# EAGLE board microSD_Shield-GiantPanel-v14 (EAGLE 6.5.0), part 1 of 3
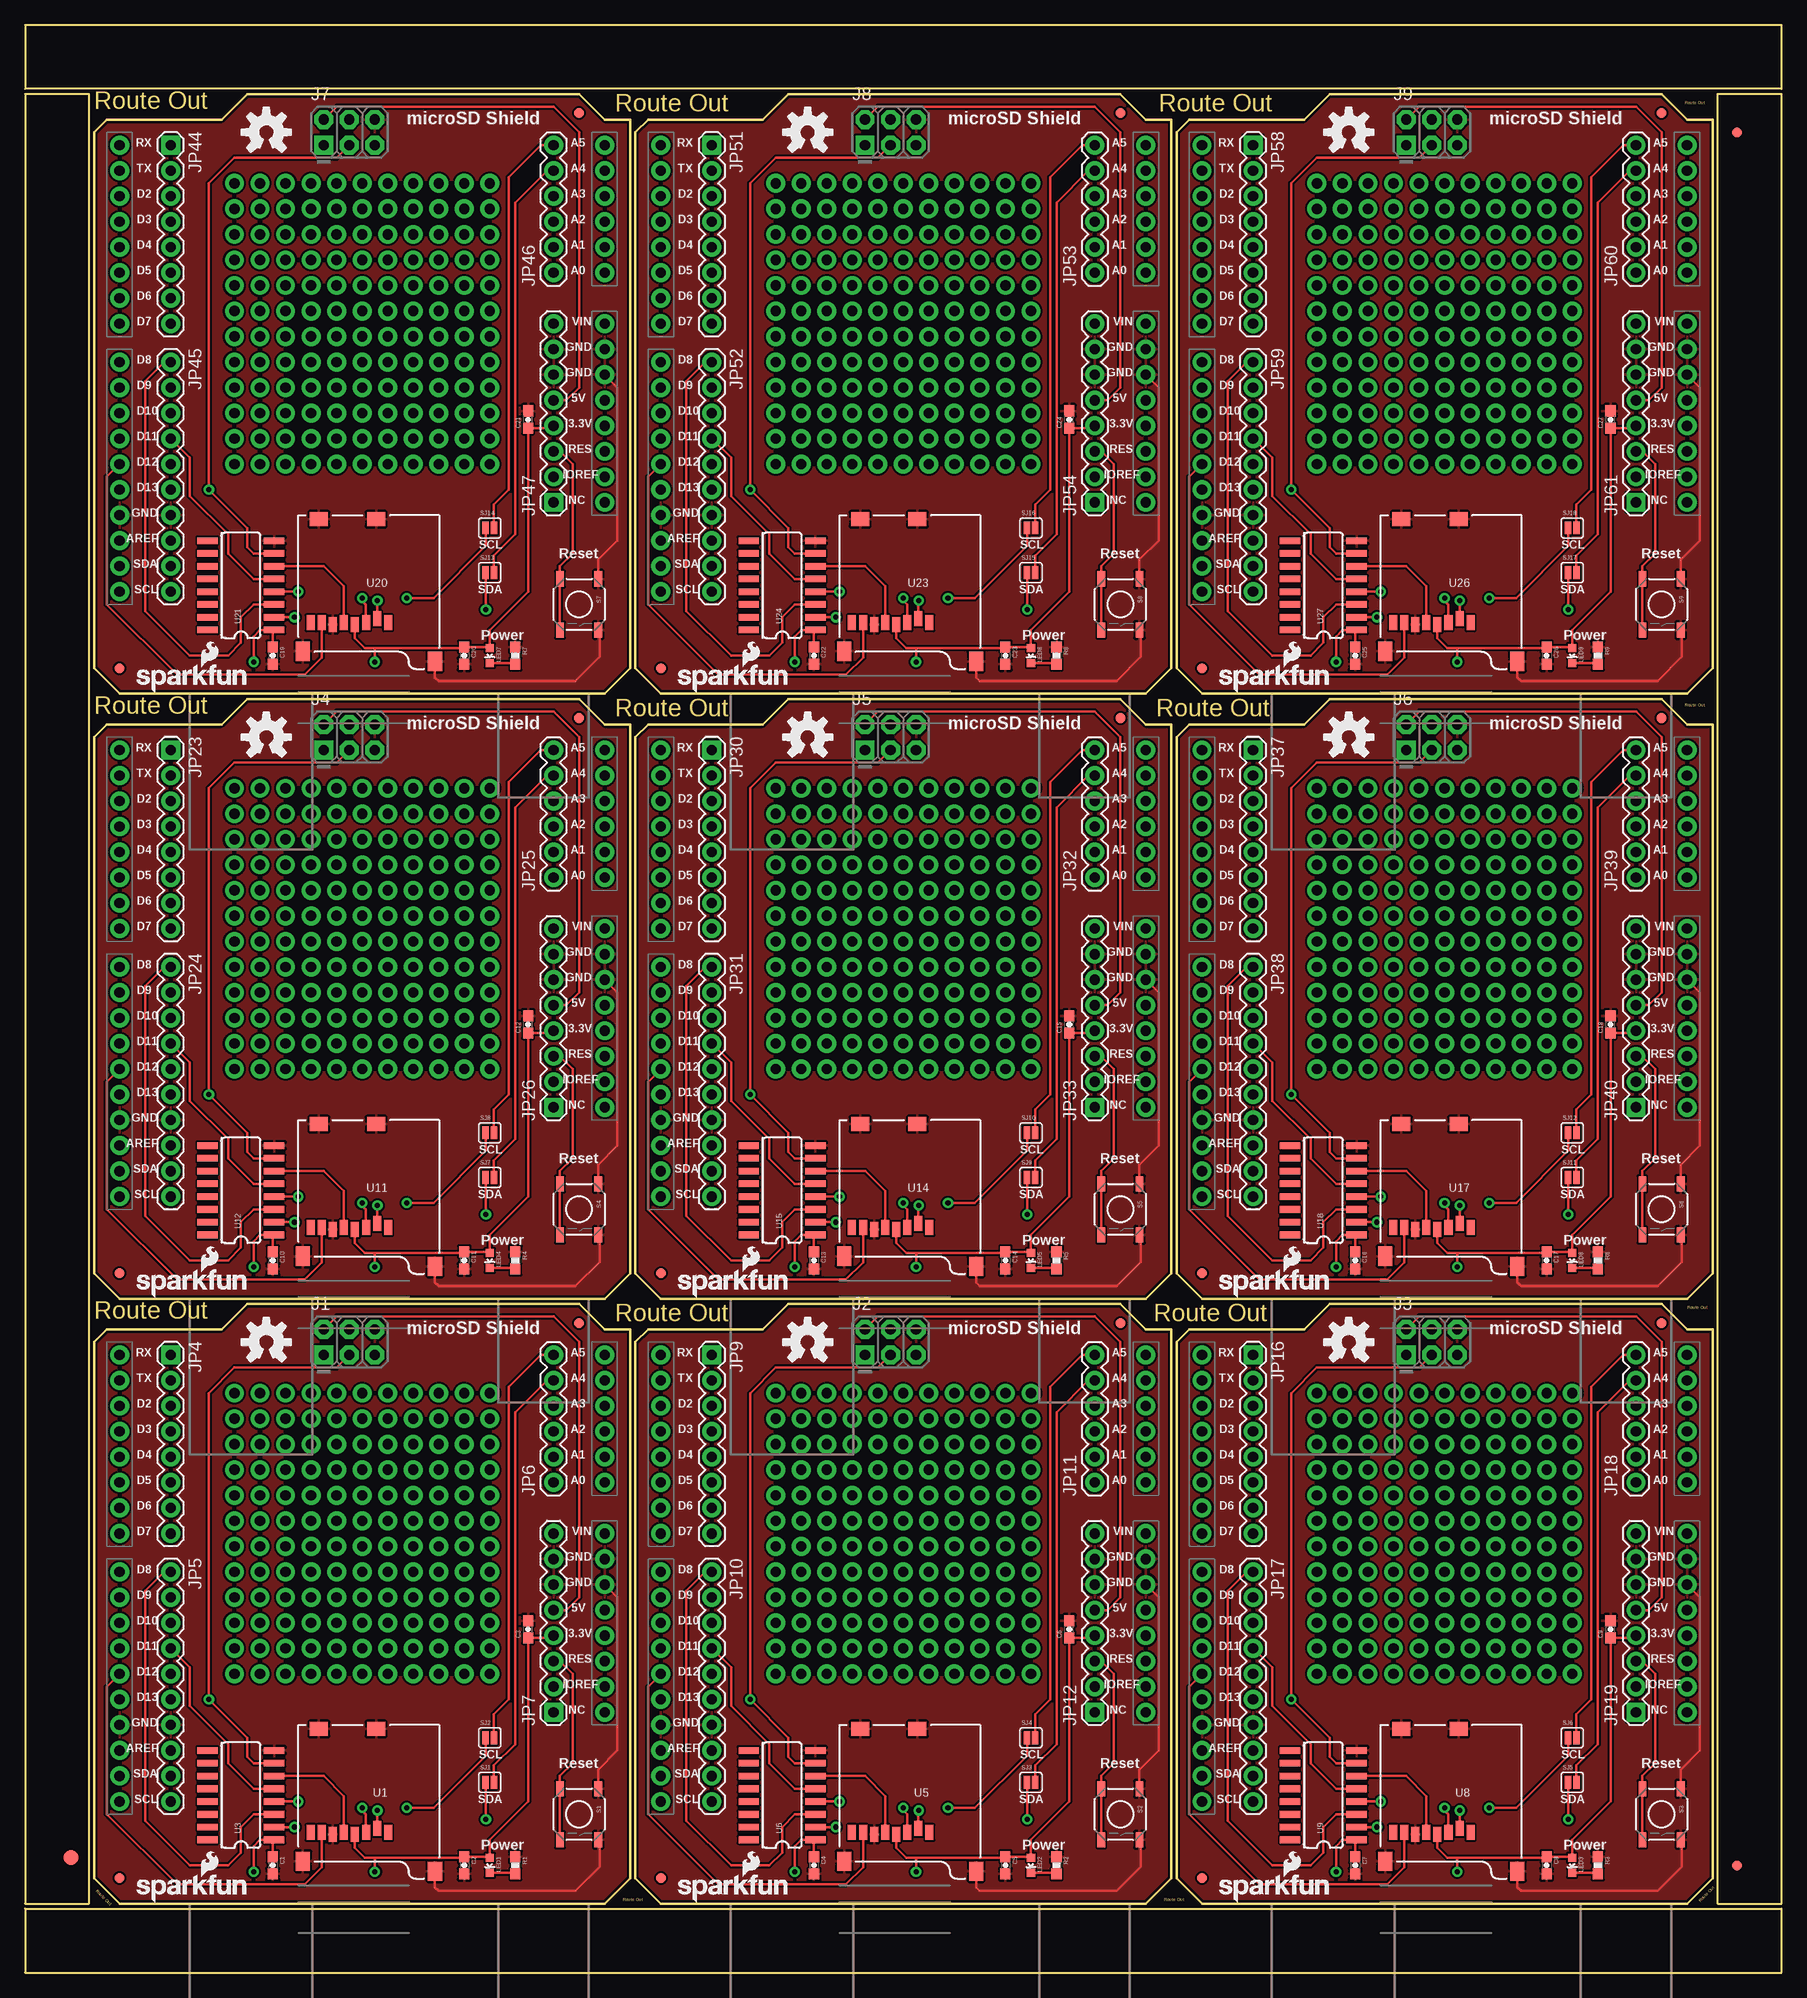
[diagram p0: board, top side]
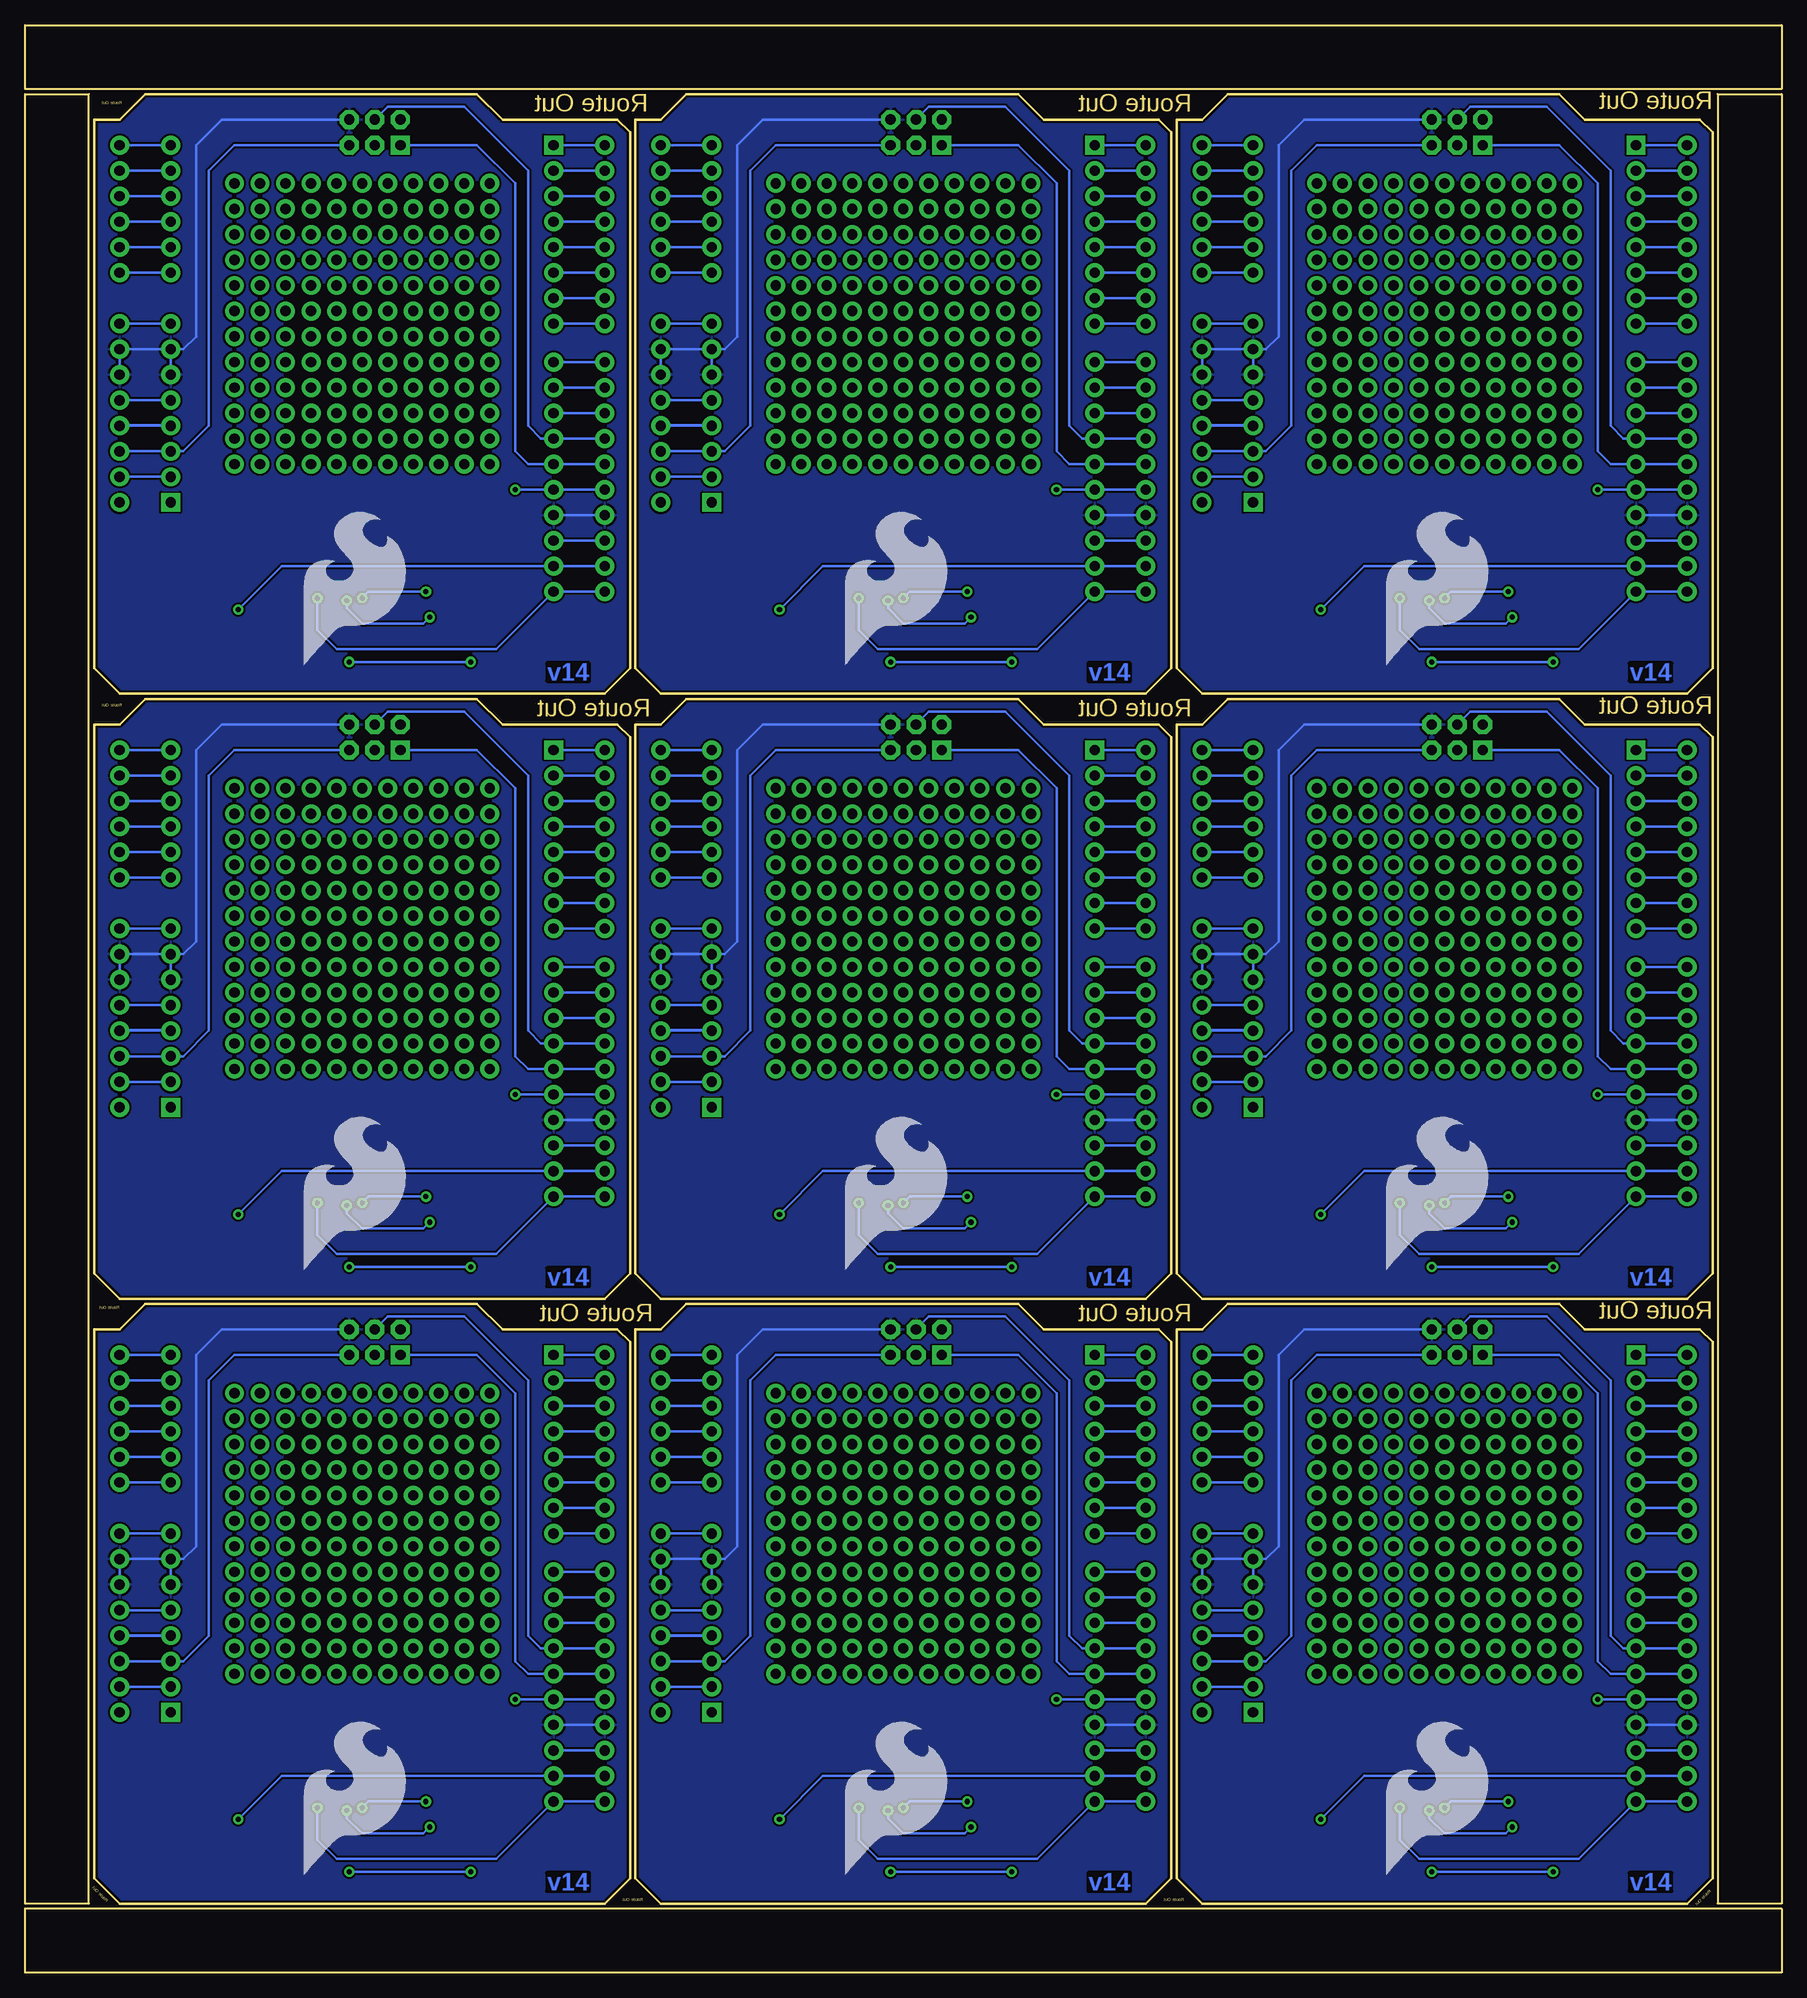
[diagram p1: board, bottom side, seen from below]

Size 174.75 x 193.8 mm. Coordinates in mm from the lower left corner, seen from the top.
Outline: 6.86,9.4 6.86,62.74 8.13,64.01 19.56,64.01 22.1,66.55 55.12,66.55 57.66,64.01 60.2,64.01 60.2,9.4 57.66,6.86 9.4,6.86 6.86,9.4
Outline: 60.71,9.4 60.71,62.74 61.98,64.01 73.41,64.01 75.95,66.55 108.97,66.55 111.51,64.01 114.05,64.01 114.05,9.4 111.51,6.86 63.25,6.86 60.71,9.4
Outline: 114.55,9.4 114.55,62.74 115.82,64.01 127.25,64.01 129.79,66.55 162.81,66.55 165.35,64.01 167.89,64.01 167.89,9.4 165.35,6.86 117.09,6.86 114.55,9.4
Outline: 6.86,69.6 6.86,122.94 8.13,124.21 19.56,124.21 22.1,126.75 55.12,126.75 57.66,124.21 60.2,124.21 60.2,69.6 57.66,67.06 9.4,67.06 6.86,69.6
Outline: 60.71,69.6 60.71,122.94 61.98,124.21 73.41,124.21 75.95,126.75 108.97,126.75 111.51,124.21 114.05,124.21 114.05,69.6 111.51,67.06 63.25,67.06 60.71,69.6
Outline: 114.55,69.6 114.55,122.94 115.82,124.21 127.25,124.21 129.79,126.75 162.81,126.75 165.35,124.21 167.89,124.21 167.89,69.6 165.35,67.06 117.09,67.06 114.55,69.6
Outline: 6.86,129.79 6.86,183.13 8.13,184.4 19.56,184.4 22.1,186.94 55.12,186.94 57.66,184.4 60.2,184.4 60.2,129.79 57.66,127.25 9.4,127.25 6.86,129.79
Outline: 60.71,129.79 60.71,183.13 61.98,184.4 73.41,184.4 75.95,186.94 108.97,186.94 111.51,184.4 114.05,184.4 114.05,129.79 111.51,127.25 63.25,127.25 60.71,129.79
Outline: 114.55,129.79 114.55,183.13 115.82,184.4 127.25,184.4 129.79,186.94 162.81,186.94 165.35,184.4 167.89,184.4 167.89,129.79 165.35,127.25 117.09,127.25 114.55,129.79
Outline: 0,6.86 6.35,6.86 6.35,186.94 0,186.94 0,6.86
Outline: 0,0 174.75,0 174.75,6.35 0,6.35 0,0
Outline: 0,193.8 0,187.45 174.75,187.45 174.75,193.8 0,193.8
Outline: 174.75,186.94 168.4,186.94 168.4,6.86 174.75,6.86 174.75,186.94
Copper layers (1*16): Top 0.035mm / dielectric 1.5mm / Bottom 0.035mm
Design rules "SparkFun *": minimum track width 8mil, minimum drill 20mil, track to track 8mil, track to pad 8mil, pad to pad 8mil, via to via 8mil, smd to smd 8mil, copper to edge 9mil, drill to drill 8mil, minimum pad ring 12mil, minimum via ring 10mil, stop-mask expansion 4mil, vias tented up to drill 20mil, thermal gap 10mil

## Footprints (pad centres in the part's own frame; a part is rotated, then mirrored left to right if it is on the bottom)
0603-CAP = smd 1.1 x 1: 1 -0.85,0; 2 0.85,0
FIDUCIAL-1.5X3 = smd 1.5 x 1.5: 1 0,0
FIDUCIAL-1X2 = smd 1 x 1: 1 0,0
2X3-NS = drill 1.016 pad 1.88 square: 1 -2.54,-1.27 | drill 1.016 pad 1.88 octagon: 2 -2.54,1.27; 3 0,-1.27; 4 0,1.27; 5 2.54,-1.27; 6 2.54,1.27
1X08 = drill 1.016 pad 1.88 square: 1 0,0 | drill 1.016 pad 1.88: 2 2.54,0; 3 5.08,0; 4 7.62,0; 5 10.16,0; 6 12.7,0; 7 15.24,0; 8 17.78,0
1X10 = drill 1.016 pad 1.88: 1 0,0; 2 2.54,0; 3 5.08,0; 4 7.62,0; 5 10.16,0; 6 12.7,0; 7 15.24,0; 8 17.78,0; 9 20.32,0; 10 22.86,0
1X06 = drill 1.016 pad 1.88: 1 0,0; 2 2.54,0; 3 5.08,0; 4 7.62,0; 5 10.16,0; 6 12.7,0
LED-0603 = smd 0.8 x 0.8: A 0,-0.75; C 0,0.75
0603-RES = smd 1.1 x 1: 1 -0.85,0; 2 0.85,0
TACTILE_SWITCH_SMD = smd 1.524 x 0.762: 1 -2.54,1.905; 2 2.54,1.905; 3 -2.54,-1.905; 4 2.54,-1.905
SJ_2S = smd 0.635 x 1.27: 1 -0.412,0; 2 0.412,0
MICRO-SD-SOCKET-PP = smd 0.8 x 1.5: 1 -8.94,10.7; 2 -7.84,10.3; 3 -6.74,10.7; 4 -5.64,10.9; 5 -4.54,10.7; 6 -3.44,10.9; 7 -2.34,10.7; 8 -1.24,10.7 | smd 1.8 x 1.4: CD1 -2.05,0.4; CD2 -7.75,0.4 | smd 1.4 x 1.9: GND1 -13.6,14.55; GND3 -0.45,13.55
UNO_R3_SHIELD_NOLABELS = drill 1.016 pad 1.88: 3.3V 50.8,26.67; 5V 50.8,29.21; A0 50.8,41.91; A1 50.8,44.45; A2 50.8,46.99; A3 50.8,49.53; A4 50.8,52.07; A5 50.8,54.61; AREF 2.54,15.24; D2 2.54,49.53; D3 2.54,46.99; D4 2.54,44.45; D5 2.54,41.91; D6 2.54,39.37; D7 2.54,36.83; D8 2.54,33.02; D9 2.54,30.48; D10 2.54,27.94; D11 2.54,25.4; D12 2.54,22.86; D13 2.54,20.32; GND@0 50.8,31.75; GND@1 50.8,34.29; GND@2 2.54,17.78; IOREF 50.8,21.59; NC 50.8,19.05; RES 50.8,24.13; RX 2.54,54.61; SCL 2.54,10.16; SDA 2.54,12.7; TX 2.54,52.07; VIN 50.8,36.83
SO016 = smd 0.66 x 2.032: 1 -4.445,-3.315; 2 -3.175,-3.315; 3 -1.905,-3.315; 4 -0.635,-3.315; 5 0.635,-3.315; 6 1.905,-3.315; 7 3.175,-3.315; 8 4.445,-3.315; 9 4.445,3.315; 10 3.175,3.315; 11 1.905,3.315; 12 0.635,3.315; 13 -0.635,3.315; 14 -1.905,3.315; 15 -3.175,3.315; 16 -4.445,3.315

## Placement (x,y rotation side)
C1  0.1uF  [0603-CAP]  24.64,10.67 270 top
C2  0.1uF  [0603-CAP]  43.69,10.67 270 top
C3  10uF  [0603-CAP]  50.04,34.16 90 top
C4  0.1uF  [0603-CAP]  78.49,10.67 270 top
C5  0.1uF  [0603-CAP]  97.54,10.67 270 top
C6  10uF  [0603-CAP]  103.89,34.16 90 top
C7  0.1uF  [0603-CAP]  132.33,10.67 270 top
C8  0.1uF  [0603-CAP]  151.38,10.67 270 top
C9  10uF  [0603-CAP]  157.73,34.16 90 top
C10  0.1uF  [0603-CAP]  24.64,70.87 270 top
C11  0.1uF  [0603-CAP]  43.69,70.87 270 top
C12  10uF  [0603-CAP]  50.04,94.36 90 top
C13  0.1uF  [0603-CAP]  78.49,70.87 270 top
C14  0.1uF  [0603-CAP]  97.54,70.87 270 top
C15  10uF  [0603-CAP]  103.89,94.36 90 top
C16  0.1uF  [0603-CAP]  132.33,70.87 270 top
C17  0.1uF  [0603-CAP]  151.38,70.87 270 top
C18  10uF  [0603-CAP]  157.73,94.36 90 top
C19  0.1uF  [0603-CAP]  24.64,131.06 270 top
C20  0.1uF  [0603-CAP]  43.69,131.06 270 top
C21  10uF  [0603-CAP]  50.04,154.56 90 top
C22  0.1uF  [0603-CAP]  78.49,131.06 270 top
C23  0.1uF  [0603-CAP]  97.54,131.06 270 top
C24  10uF  [0603-CAP]  103.89,154.56 90 top
C25  0.1uF  [0603-CAP]  132.33,131.06 270 top
C26  0.1uF  [0603-CAP]  151.38,131.06 270 top
C27  10uF  [0603-CAP]  157.73,154.56 90 top
E$1  [FIDUCIAL-1.5X3]  4.57,11.43 0 top
E$6  [FIDUCIAL-1X2]  170.31,183.13 180 top
E$8  [FIDUCIAL-1X2]  170.31,10.67 0 top
J1  AVR_SPI_PRG_6NS  [2X3-NS]  32.26,62.74 0 top
J2  AVR_SPI_PRG_6NS  [2X3-NS]  86.11,62.74 0 top
J3  AVR_SPI_PRG_6NS  [2X3-NS]  139.95,62.74 0 top
J4  AVR_SPI_PRG_6NS  [2X3-NS]  32.26,122.94 0 top
J5  AVR_SPI_PRG_6NS  [2X3-NS]  86.11,122.94 0 top
J6  AVR_SPI_PRG_6NS  [2X3-NS]  139.95,122.94 0 top
J7  AVR_SPI_PRG_6NS  [2X3-NS]  32.26,183.13 0 top
J8  AVR_SPI_PRG_6NS  [2X3-NS]  86.11,183.13 0 top
J9  AVR_SPI_PRG_6NS  [2X3-NS]  139.95,183.13 0 top
JP1  SFE_LOGO_NAME_FLAME.1_INCH  [SFE_LOGO_NAME_FLAME_.1]  10.67,6.86 0 top
JP2  FIDUCIAL1X2  [FIDUCIAL-1X2]  55.12,64.64 0 top
JP3  FIDUCIAL1X2  [FIDUCIAL-1X2]  9.4,9.4 0 top
JP4  [1X08]  14.48,61.47 270 top
JP5  M10"  [1X10]  14.48,39.88 270 top
JP6  [1X06]  52.58,48.77 90 top
JP7  [1X08]  52.58,25.91 90 top
JP8  SFE_LOGO_NAME_FLAME.1_INCH  [SFE_LOGO_NAME_FLAME_.1]  64.52,6.86 0 top
JP9  [1X08]  68.33,61.47 270 top
JP10  M10"  [1X10]  68.33,39.88 270 top
JP11  [1X06]  106.43,48.77 90 top
JP12  [1X08]  106.43,25.91 90 top
JP13  FIDUCIAL1X2  [FIDUCIAL-1X2]  108.97,64.64 0 top
JP14  FIDUCIAL1X2  [FIDUCIAL-1X2]  63.25,9.4 0 top
JP15  SFE_LOGO_NAME_FLAME.1_INCH  [SFE_LOGO_NAME_FLAME_.1]  118.36,6.86 0 top
JP16  [1X08]  122.17,61.47 270 top
JP17  M10"  [1X10]  122.17,39.88 270 top
JP18  [1X06]  160.27,48.77 90 top
JP19  [1X08]  160.27,25.91 90 top
JP20  FIDUCIAL1X2  [FIDUCIAL-1X2]  162.81,64.64 0 top
JP21  FIDUCIAL1X2  [FIDUCIAL-1X2]  117.09,9.4 0 top
JP22  SFE_LOGO_NAME_FLAME.1_INCH  [SFE_LOGO_NAME_FLAME_.1]  10.67,67.06 0 top
JP23  [1X08]  14.48,121.67 270 top
JP24  M10"  [1X10]  14.48,100.08 270 top
JP25  [1X06]  52.58,108.97 90 top
JP26  [1X08]  52.58,86.11 90 top
JP27  FIDUCIAL1X2  [FIDUCIAL-1X2]  55.12,124.84 0 top
JP28  FIDUCIAL1X2  [FIDUCIAL-1X2]  9.4,69.6 0 top
JP29  SFE_LOGO_NAME_FLAME.1_INCH  [SFE_LOGO_NAME_FLAME_.1]  64.52,67.06 0 top
JP30  [1X08]  68.33,121.67 270 top
JP31  M10"  [1X10]  68.33,100.08 270 top
JP32  [1X06]  106.43,108.97 90 top
JP33  [1X08]  106.43,86.11 90 top
JP34  FIDUCIAL1X2  [FIDUCIAL-1X2]  108.97,124.84 0 top
JP35  FIDUCIAL1X2  [FIDUCIAL-1X2]  63.25,69.6 0 top
JP36  SFE_LOGO_NAME_FLAME.1_INCH  [SFE_LOGO_NAME_FLAME_.1]  118.36,67.06 0 top
JP37  [1X08]  122.17,121.67 270 top
JP38  M10"  [1X10]  122.17,100.08 270 top
JP39  [1X06]  160.27,108.97 90 top
JP40  [1X08]  160.27,86.11 90 top
JP41  FIDUCIAL1X2  [FIDUCIAL-1X2]  162.81,124.84 0 top
JP42  FIDUCIAL1X2  [FIDUCIAL-1X2]  117.09,69.6 0 top
JP43  SFE_LOGO_NAME_FLAME.1_INCH  [SFE_LOGO_NAME_FLAME_.1]  10.67,127.25 0 top
JP44  [1X08]  14.48,181.86 270 top
JP45  M10"  [1X10]  14.48,160.27 270 top
JP46  [1X06]  52.58,169.16 90 top
JP47  [1X08]  52.58,146.3 90 top
JP48  FIDUCIAL1X2  [FIDUCIAL-1X2]  55.12,185.04 0 top
JP49  FIDUCIAL1X2  [FIDUCIAL-1X2]  9.4,129.79 0 top
JP50  SFE_LOGO_NAME_FLAME.1_INCH  [SFE_LOGO_NAME_FLAME_.1]  64.52,127.25 0 top
JP51  [1X08]  68.33,181.86 270 top
JP52  M10"  [1X10]  68.33,160.27 270 top
JP53  [1X06]  106.43,169.16 90 top
JP54  [1X08]  106.43,146.3 90 top
JP55  FIDUCIAL1X2  [FIDUCIAL-1X2]  108.97,185.04 0 top
JP56  FIDUCIAL1X2  [FIDUCIAL-1X2]  63.25,129.79 0 top
JP57  SFE_LOGO_NAME_FLAME.1_INCH  [SFE_LOGO_NAME_FLAME_.1]  118.36,127.25 0 top
JP58  [1X08]  122.17,181.86 270 top
JP59  M10"  [1X10]  122.17,160.27 270 top
JP60  [1X06]  160.27,169.16 90 top
JP61  [1X08]  160.27,146.3 90 top
JP62  FIDUCIAL1X2  [FIDUCIAL-1X2]  162.81,185.04 0 top
JP63  FIDUCIAL1X2  [FIDUCIAL-1X2]  117.09,129.79 0 top
LED1  Red  [LED-0603]  46.23,10.67 180 top
LED2  Red  [LED-0603]  100.08,10.67 180 top
LED3  Red  [LED-0603]  153.92,10.67 180 top
LED4  Red  [LED-0603]  46.23,70.87 180 top
LED5  Red  [LED-0603]  100.08,70.87 180 top
LED6  Red  [LED-0603]  153.92,70.87 180 top
LED7  Red  [LED-0603]  46.23,131.06 180 top
LED8  Red  [LED-0603]  100.08,131.06 180 top
LED9  Red  [LED-0603]  153.92,131.06 180 top
LOGO1  OSHW-LOGOM  [OSHW-LOGO-M]  24,62.74 0 top
LOGO2  SFE_LOGO_FLAME.6_INCH  [SFE_LOGO_FLAME_.6]  39.88,9.4 0 bottom
LOGO3  OSHW-LOGOM  [OSHW-LOGO-M]  77.85,62.74 0 top
LOGO4  SFE_LOGO_FLAME.6_INCH  [SFE_LOGO_FLAME_.6]  93.73,9.4 0 bottom
LOGO5  OSHW-LOGOM  [OSHW-LOGO-M]  131.7,62.74 0 top
LOGO6  SFE_LOGO_FLAME.6_INCH  [SFE_LOGO_FLAME_.6]  147.57,9.4 0 bottom
LOGO7  OSHW-LOGOM  [OSHW-LOGO-M]  24,122.94 0 top
LOGO8  SFE_LOGO_FLAME.6_INCH  [SFE_LOGO_FLAME_.6]  39.88,69.6 0 bottom
LOGO9  OSHW-LOGOM  [OSHW-LOGO-M]  77.85,122.94 0 top
LOGO10  SFE_LOGO_FLAME.6_INCH  [SFE_LOGO_FLAME_.6]  93.73,69.6 0 bottom
LOGO11  OSHW-LOGOM  [OSHW-LOGO-M]  131.7,122.94 0 top
LOGO12  SFE_LOGO_FLAME.6_INCH  [SFE_LOGO_FLAME_.6]  147.57,69.6 0 bottom
LOGO13  OSHW-LOGOM  [OSHW-LOGO-M]  24,183.13 0 top
LOGO14  SFE_LOGO_FLAME.6_INCH  [SFE_LOGO_FLAME_.6]  39.88,129.79 0 bottom
LOGO15  OSHW-LOGOM  [OSHW-LOGO-M]  77.85,183.13 0 top
LOGO16  SFE_LOGO_FLAME.6_INCH  [SFE_LOGO_FLAME_.6]  93.73,129.79 0 bottom
LOGO17  OSHW-LOGOM  [OSHW-LOGO-M]  131.7,183.13 0 top
LOGO18  SFE_LOGO_FLAME.6_INCH  [SFE_LOGO_FLAME_.6]  147.57,129.79 0 bottom
R1  1k  [0603-RES]  48.77,10.67 270 top
R2  1k  [0603-RES]  102.62,10.67 270 top
R3  1k  [0603-RES]  156.46,10.67 270 top
R4  1k  [0603-RES]  48.77,70.87 270 top
R5  1k  [0603-RES]  102.62,70.87 270 top
R6  1k  [0603-RES]  156.46,70.87 270 top
R7  1k  [0603-RES]  48.77,131.06 270 top
R8  1k  [0603-RES]  102.62,131.06 270 top
R9  1k  [0603-RES]  156.46,131.06 270 top
S1  [TACTILE_SWITCH_SMD]  55.12,15.75 270 top
S2  [TACTILE_SWITCH_SMD]  108.97,15.75 270 top
S3  [TACTILE_SWITCH_SMD]  162.81,15.75 270 top
S4  [TACTILE_SWITCH_SMD]  55.12,75.95 270 top
S5  [TACTILE_SWITCH_SMD]  108.97,75.95 270 top
S6  [TACTILE_SWITCH_SMD]  162.81,75.95 270 top
S7  [TACTILE_SWITCH_SMD]  55.12,136.14 270 top
S8  [TACTILE_SWITCH_SMD]  108.97,136.14 270 top
S9  [TACTILE_SWITCH_SMD]  162.81,136.14 270 top
SJ1  SOLDERJUMPERNC  [SJ_2S]  46.23,18.92 0 top
SJ2  SOLDERJUMPERNC  [SJ_2S]  46.23,23.37 0 top
SJ3  SOLDERJUMPERNC  [SJ_2S]  100.08,18.92 0 top
SJ4  SOLDERJUMPERNC  [SJ_2S]  100.08,23.37 0 top
SJ5  SOLDERJUMPERNC  [SJ_2S]  153.92,18.92 0 top
SJ6  SOLDERJUMPERNC  [SJ_2S]  153.92,23.37 0 top
SJ7  SOLDERJUMPERNC  [SJ_2S]  46.23,79.12 0 top
SJ8  SOLDERJUMPERNC  [SJ_2S]  46.23,83.57 0 top
SJ9  SOLDERJUMPERNC  [SJ_2S]  100.08,79.12 0 top
SJ10  SOLDERJUMPERNC  [SJ_2S]  100.08,83.57 0 top
SJ11  SOLDERJUMPERNC  [SJ_2S]  153.92,79.12 0 top
SJ12  SOLDERJUMPERNC  [SJ_2S]  153.92,83.57 0 top
SJ13  SOLDERJUMPERNC  [SJ_2S]  46.23,139.32 0 top
SJ14  SOLDERJUMPERNC  [SJ_2S]  46.23,143.76 0 top
SJ15  SOLDERJUMPERNC  [SJ_2S]  100.08,139.32 0 top
SJ16  SOLDERJUMPERNC  [SJ_2S]  100.08,143.76 0 top
SJ17  SOLDERJUMPERNC  [SJ_2S]  153.92,139.32 0 top
SJ18  SOLDERJUMPERNC  [SJ_2S]  153.92,143.76 0 top
U1  USD-SOCKETNEW  [MICRO-SD-SOCKET-PP]  27.18,24.64 180 top
U2  ARDUINO_R3_SHIELDNOLABELS  [UNO_R3_SHIELD_NOLABELS]  6.86,6.86 0 top
U3  HEX_CONVERTER  [SO016]  21.46,17.65 90 top
U4  ARDUINO_R3_SHIELDNOLABELS  [UNO_R3_SHIELD_NOLABELS]  60.71,6.86 0 top
U5  USD-SOCKETNEW  [MICRO-SD-SOCKET-PP]  81.03,24.64 180 top
U6  HEX_CONVERTER  [SO016]  75.31,17.65 90 top
U7  ARDUINO_R3_SHIELDNOLABELS  [UNO_R3_SHIELD_NOLABELS]  114.55,6.86 0 top
U8  USD-SOCKETNEW  [MICRO-SD-SOCKET-PP]  134.87,24.64 180 top
U9  HEX_CONVERTER  [SO016]  129.16,17.65 90 top
U10  ARDUINO_R3_SHIELDNOLABELS  [UNO_R3_SHIELD_NOLABELS]  6.86,67.06 0 top
U11  USD-SOCKETNEW  [MICRO-SD-SOCKET-PP]  27.18,84.84 180 top
U12  HEX_CONVERTER  [SO016]  21.46,77.85 90 top
U13  ARDUINO_R3_SHIELDNOLABELS  [UNO_R3_SHIELD_NOLABELS]  60.71,67.06 0 top
U14  USD-SOCKETNEW  [MICRO-SD-SOCKET-PP]  81.03,84.84 180 top
U15  HEX_CONVERTER  [SO016]  75.31,77.85 90 top
U16  ARDUINO_R3_SHIELDNOLABELS  [UNO_R3_SHIELD_NOLABELS]  114.55,67.06 0 top
U17  USD-SOCKETNEW  [MICRO-SD-SOCKET-PP]  134.87,84.84 180 top
U18  HEX_CONVERTER  [SO016]  129.16,77.85 90 top
U19  ARDUINO_R3_SHIELDNOLABELS  [UNO_R3_SHIELD_NOLABELS]  6.86,127.25 0 top
U20  USD-SOCKETNEW  [MICRO-SD-SOCKET-PP]  27.18,145.03 180 top
U21  HEX_CONVERTER  [SO016]  21.46,138.05 90 top
U22  ARDUINO_R3_SHIELDNOLABELS  [UNO_R3_SHIELD_NOLABELS]  60.71,127.25 0 top
U23  USD-SOCKETNEW  [MICRO-SD-SOCKET-PP]  81.03,145.03 180 top
U24  HEX_CONVERTER  [SO016]  75.31,138.05 90 top
U25  ARDUINO_R3_SHIELDNOLABELS  [UNO_R3_SHIELD_NOLABELS]  114.55,127.25 0 top
U26  USD-SOCKETNEW  [MICRO-SD-SOCKET-PP]  134.87,145.03 180 top
U27  HEX_CONVERTER  [SO016]  129.16,138.05 90 top

## Library data of the parts
C1 C2 C4 C5 C7 C8 C10 C11 C13 C14 C16 C17 C19 C20 C22 C23 C25 C26 = SparkFun-Capacitors; PROD_ID: CAP-08604
C3 C6 C9 C12 C15 C18 C21 C24 C27 = SparkFun-Capacitors; PROD_ID: CAP-11015
E$1 = SparkFun-Retired
E$6 E$8 JP1-JP3 JP8 JP13-JP15 JP20-JP22 JP27-JP29 JP34-JP36 JP41-JP43 JP48-JP50 JP55-JP57 JP62 JP63 LOGO1-LOGO18 = SparkFun-Aesthetics
J1-J9 JP5 JP7 JP10 JP12 JP17 JP19 JP24 JP26 JP31 JP33 JP38 JP40 JP45 JP47 JP52 JP54 JP59 JP61 = SparkFun-Connectors
JP4 JP6 JP9 JP11 JP16 JP18 JP23 JP25 JP30 JP32 JP37 JP39 JP44 JP46 JP51 JP53 JP58 JP60 LED1-LED9 R1-R9 S1-S9 U1 U3 U5 U6 U8 U9 U11 U12 U14 U15 U17 U18 U20 U21 U23 U24 U26 U27 = SparkFun
SJ1-SJ18 = SparkFun-Passives
U2 U4 U7 U10 U13 U16 U19 U22 U25 = SparkFun-Boards

## Nets
3.3V: C1.1 C2.1 C3.1 JP7.4 LED1.A U1.4 U2.3.3V U3.1
3.3V1: C4.1 C5.1 C6.1 JP12.4 LED2.A U4.3.3V U5.4 U6.1
3.3V2: C7.1 C8.1 C9.1 JP19.4 LED3.A U7.3.3V U8.4 U9.1
3.3V3: C10.1 C11.1 C12.1 JP26.4 LED4.A U10.3.3V U11.4 U12.1
3.3V4: C13.1 C14.1 C15.1 JP33.4 LED5.A U13.3.3V U14.4 U15.1
3.3V5: C16.1 C17.1 C18.1 JP40.4 LED6.A U16.3.3V U17.4 U18.1
3.3V6: C19.1 C20.1 C21.1 JP47.4 LED7.A U19.3.3V U20.4 U21.1
3.3V7: C22.1 C23.1 C24.1 JP54.4 LED8.A U22.3.3V U23.4 U24.1
3.3V8: C25.1 C26.1 C27.1 JP61.4 LED9.A U25.3.3V U26.4 U27.1
5V: J1.2 JP7.5 U2.5V
5V1: J2.2 JP12.5 U4.5V
5V2: J3.2 JP19.5 U7.5V
5V3: J4.2 JP26.5 U10.5V
5V4: J5.2 JP33.5 U13.5V
5V5: J6.2 JP40.5 U16.5V
5V6: J7.2 JP47.5 U19.5V
5V7: J8.2 JP54.5 U22.5V
5V8: J9.2 JP61.5 U25.5V
A0: JP6.1 U2.A0
A1: JP6.2 U2.A1
A2: JP6.3 U2.A2
A3: JP6.4 U2.A3
A4: JP6.5 SJ1.2 U2.A4
A5: JP6.6 SJ2.2 U2.A5
A6: JP11.1 U4.A0
A7: JP11.2 U4.A1
A8: JP11.3 U4.A2
A9: JP11.4 U4.A3
A10: JP11.5 SJ3.2 U4.A4
A11: JP11.6 SJ4.2 U4.A5
A12: JP18.1 U7.A0
A13: JP18.2 U7.A1
A14: JP18.3 U7.A2
A15: JP18.4 U7.A3
A16: JP18.5 SJ5.2 U7.A4
A17: JP18.6 SJ6.2 U7.A5
A18: JP25.1 U10.A0
A19: JP25.2 U10.A1
A20: JP25.3 U10.A2
A21: JP25.4 U10.A3
A22: JP25.5 SJ7.2 U10.A4
A23: JP25.6 SJ8.2 U10.A5
A24: JP32.1 U13.A0
A25: JP32.2 U13.A1
A26: JP32.3 U13.A2
A27: JP32.4 U13.A3
A28: JP32.5 SJ9.2 U13.A4
A29: JP32.6 SJ10.2 U13.A5
A30: JP39.1 U16.A0
A31: JP39.2 U16.A1
A32: JP39.3 U16.A2
A33: JP39.4 U16.A3
A34: JP39.5 SJ11.2 U16.A4
A35: JP39.6 SJ12.2 U16.A5
A36: JP46.1 U19.A0
A37: JP46.2 U19.A1
A38: JP46.3 U19.A2
A39: JP46.4 U19.A3
A40: JP46.5 SJ13.2 U19.A4
A41: JP46.6 SJ14.2 U19.A5
A42: JP53.1 U22.A0
A43: JP53.2 U22.A1
A44: JP53.3 U22.A2
A45: JP53.4 U22.A3
A46: JP53.5 SJ15.2 U22.A4
A47: JP53.6 SJ16.2 U22.A5
A48: JP60.1 U25.A0
A49: JP60.2 U25.A1
A50: JP60.3 U25.A2
A51: JP60.4 U25.A3
A52: JP60.5 SJ17.2 U25.A4
A53: JP60.6 SJ18.2 U25.A5
AREF: JP5.8 U2.AREF
AREF1: JP10.8 U4.AREF
AREF2: JP17.8 U7.AREF
AREF3: JP24.8 U10.AREF
AREF4: JP31.8 U13.AREF
AREF5: JP38.8 U16.AREF
AREF6: JP45.8 U19.AREF
AREF7: JP52.8 U22.AREF
AREF8: JP59.8 U25.AREF
CS: JP5.1 U2.D8 U3.3
CS1: JP10.1 U4.D8 U6.3
CS2: JP17.1 U7.D8 U9.3
CS3: JP24.1 U10.D8 U12.3
CS4: JP31.1 U13.D8 U15.3
CS5: JP38.1 U16.D8 U18.3
CS6: JP45.1 U19.D8 U21.3
CS7: JP52.1 U22.D8 U24.3
CS8: JP59.1 U25.D8 U27.3
D1: JP9.3 U4.D2
D2: JP4.3 U2.D2
D3: JP4.4 U2.D3
D4: JP4.5 U2.D4
D5: JP4.6 U2.D5
D6: JP4.7 U2.D6
D7: JP4.8 U2.D7
D8: JP9.4 U4.D3
D9: JP5.2 U2.D9
D10: JP5.3 U2.D10
D11: JP9.5 U4.D4
D12: JP9.6 U4.D5
D13: JP9.7 U4.D6
D14: JP9.8 U4.D7
D15: JP10.2 U4.D9
D16: JP10.3 U4.D10
D17: JP16.3 U7.D2
D18: JP16.4 U7.D3
D19: JP16.5 U7.D4
D20: JP16.6 U7.D5
D21: JP16.7 U7.D6
D22: JP16.8 U7.D7
D23: JP17.2 U7.D9
D24: JP17.3 U7.D10
D25: JP23.3 U10.D2
D26: JP23.4 U10.D3
D27: JP23.5 U10.D4
D28: JP23.6 U10.D5
D29: JP23.7 U10.D6
D30: JP23.8 U10.D7
D31: JP24.2 U10.D9
D32: JP24.3 U10.D10
D33: JP30.3 U13.D2
D34: JP30.4 U13.D3
D35: JP30.5 U13.D4
D36: JP30.6 U13.D5
D37: JP30.7 U13.D6
D38: JP30.8 U13.D7
D39: JP31.2 U13.D9
D40: JP31.3 U13.D10
D41: JP37.3 U16.D2
D42: JP37.4 U16.D3
D43: JP37.5 U16.D4
D44: JP37.6 U16.D5
D45: JP37.7 U16.D6
D46: JP37.8 U16.D7
D47: JP38.2 U16.D9
D48: JP38.3 U16.D10
D49: JP44.3 U19.D2
D50: JP44.4 U19.D3
D51: JP44.5 U19.D4
D52: JP44.6 U19.D5
D53: JP44.7 U19.D6
D54: JP44.8 U19.D7
D55: JP45.2 U19.D9
D56: JP45.3 U19.D10
D57: JP51.3 U22.D2
D58: JP51.4 U22.D3
D59: JP51.5 U22.D4
D60: JP51.6 U22.D5
D61: JP51.7 U22.D6
D62: JP51.8 U22.D7
D63: JP52.2 U22.D9
D64: JP52.3 U22.D10
D65: JP58.3 U25.D2
D66: JP58.4 U25.D3
D67: JP58.5 U25.D4
D68: JP58.6 U25.D5
D69: JP58.7 U25.D6
D70: JP58.8 U25.D7
D71: JP59.2 U25.D9
D72: JP59.3 U25.D10
GND: C1.2 C2.2 C3.2 J1.6 JP5.7 JP7.6 JP7.7 R1.1 S1.1 S1.2 U1.6 U1.CD1 U1.CD2 U1.GND1 U1.GND3 U2.GND@0 U2.GND@1 U2.GND@2 U3.8
GND1: C4.2 C5.2 C6.2 J2.6 JP10.7 JP12.6 JP12.7 R2.1 S2.1 S2.2 U4.GND@0 U4.GND@1 U4.GND@2 U5.6 U5.CD1 U5.CD2 U5.GND1 U5.GND3 U6.8
GND2: C7.2 C8.2 C9.2 J3.6 JP17.7 JP19.6 JP19.7 R3.1 S3.1 S3.2 U7.GND@0 U7.GND@1 U7.GND@2 U8.6 U8.CD1 U8.CD2 U8.GND1 U8.GND3 U9.8
GND3: C10.2 C11.2 C12.2 J4.6 JP24.7 JP26.6 JP26.7 R4.1 S4.1 S4.2 U10.GND@0 U10.GND@1 U10.GND@2 U11.6 U11.CD1 U11.CD2 U11.GND1 U11.GND3 U12.8
GND4: C13.2 C14.2 C15.2 J5.6 JP31.7 JP33.6 JP33.7 R5.1 S5.1 S5.2 U13.GND@0 U13.GND@1 U13.GND@2 U14.6 U14.CD1 U14.CD2 U14.GND1 U14.GND3 U15.8
GND5: C16.2 C17.2 C18.2 J6.6 JP38.7 JP40.6 JP40.7 R6.1 S6.1 S6.2 U16.GND@0 U16.GND@1 U16.GND@2 U17.6 U17.CD1 U17.CD2 U17.GND1 U17.GND3 U18.8
GND6: C19.2 C20.2 C21.2 J7.6 JP45.7 JP47.6 JP47.7 R7.1 S7.1 S7.2 U19.GND@0 U19.GND@1 U19.GND@2 U20.6 U20.CD1 U20.CD2 U20.GND1 U20.GND3 U21.8
GND7: C22.2 C23.2 C24.2 J8.6 JP52.7 JP54.6 JP54.7 R8.1 S8.1 S8.2 U22.GND@0 U22.GND@1 U22.GND@2 U23.6 U23.CD1 U23.CD2 U23.GND1 U23.GND3 U24.8
GND8: C25.2 C26.2 C27.2 J9.6 JP59.7 JP61.6 JP61.7 R9.1 S9.1 S9.2 U25.GND@0 U25.GND@1 U25.GND@2 U26.6 U26.CD1 U26.CD2 U26.GND1 U26.GND3 U27.8
IOREF: JP7.2 U2.IOREF
IOREF1: JP12.2 U4.IOREF
IOREF2: JP19.2 U7.IOREF
IOREF3: JP26.2 U10.IOREF
IOREF4: JP33.2 U13.IOREF
IOREF5: JP40.2 U16.IOREF
IOREF6: JP47.2 U19.IOREF
IOREF7: JP54.2 U22.IOREF
IOREF8: JP61.2 U25.IOREF
MISO: J1.1 JP5.5 U1.7 U2.D12
MISO1: J2.1 JP10.5 U4.D12 U5.7
MISO2: J3.1 JP17.5 U7.D12 U8.7
MISO3: J4.1 JP24.5 U10.D12 U11.7
MISO4: J5.1 JP31.5 U13.D12 U14.7
MISO5: J6.1 JP38.5 U16.D12 U17.7
MISO6: J7.1 JP45.5 U19.D12 U20.7
MISO7: J8.1 JP52.5 U22.D12 U23.7
MISO8: J9.1 JP59.5 U25.D12 U26.7
MOSI: J1.4 JP5.4 U2.D11 U3.5
MOSI1: J2.4 JP10.4 U4.D11 U6.5
MOSI2: J3.4 JP17.4 U7.D11 U9.5
MOSI3: J4.4 JP24.4 U10.D11 U12.5
MOSI4: J5.4 JP31.4 U13.D11 U15.5
MOSI5: J6.4 JP38.4 U16.D11 U18.5
MOSI6: J7.4 JP45.4 U19.D11 U21.5
MOSI7: J8.4 JP52.4 U22.D11 U24.5
MOSI8: J9.4 JP59.4 U25.D11 U27.5
N$1: U5.3 U6.4
N$2: U1.3 U3.4
N$3: LED2.C R2.2
N$4: U1.5 U3.6
N$6: LED1.C R1.2
N$163: U1.2 U3.2
N$271: U5.2 U6.2
N$272: U5.5 U6.6
N$273: U8.3 U9.4
N$274: LED3.C R3.2
N$407: U8.2 U9.2
N$408: U8.5 U9.6
N$409: U11.3 U12.4
N$410: LED4.C R4.2
N$543: U11.2 U12.2
N$544: U11.5 U12.6
N$545: U14.3 U15.4
N$546: LED5.C R5.2
N$679: U14.2 U15.2
N$680: U14.5 U15.6
N$681: U17.3 U18.4
N$682: LED6.C R6.2
N$815: U17.2 U18.2
N$816: U17.5 U18.6
N$817: U20.3 U21.4
N$818: LED7.C R7.2
N$951: U20.2 U21.2
N$952: U20.5 U21.6
N$953: U23.3 U24.4
N$954: LED8.C R8.2
N$1087: U23.2 U24.2
N$1088: U23.5 U24.6
N$1089: U26.3 U27.4
N$1090: LED9.C R9.2
N$1223: U26.2 U27.2
N$1224: U26.5 U27.6
NC: JP7.1
NC1: JP12.1
NC2: JP19.1
NC3: JP26.1
NC4: JP33.1
NC5: JP40.1
NC6: JP47.1
NC7: JP54.1
NC8: JP61.1
RES: J1.5 JP7.3 S1.3 S1.4 U2.RES
RES1: J2.5 JP12.3 S2.3 S2.4 U4.RES
RES2: J3.5 JP19.3 S3.3 S3.4 U7.RES
RES3: J4.5 JP26.3 S4.3 S4.4 U10.RES
RES4: J5.5 JP33.3 S5.3 S5.4 U13.RES
RES5: J6.5 JP40.3 S6.3 S6.4 U16.RES
RES6: J7.5 JP47.3 S7.3 S7.4 U19.RES
RES7: J8.5 JP54.3 S8.3 S8.4 U22.RES
RES8: J9.5 JP61.3 S9.3 S9.4 U25.RES
RX: JP4.1 U2.RX
RX1: JP9.1 U4.RX
RX2: JP16.1 U7.RX
RX3: JP23.1 U10.RX
RX4: JP30.1 U13.RX
RX5: JP37.1 U16.RX
RX6: JP44.1 U19.RX
RX7: JP51.1 U22.RX
RX8: JP58.1 U25.RX
SCK: J1.3 JP5.6 U2.D13 U3.7
SCK1: J2.3 JP10.6 U4.D13 U6.7
SCK2: J3.3 JP17.6 U7.D13 U9.7
SCK3: J4.3 JP24.6 U10.D13 U12.7
SCK4: J5.3 JP31.6 U13.D13 U15.7
SCK5: J6.3 JP38.6 U16.D13 U18.7
SCK6: J7.3 JP45.6 U19.D13 U21.7
SCK7: J8.3 JP52.6 U22.D13 U24.7
SCK8: J9.3 JP59.6 U25.D13 U27.7
SCL: JP5.10 SJ2.1 U2.SCL
SCL1: JP10.10 SJ4.1 U4.SCL
SCL2: JP17.10 SJ6.1 U7.SCL
SCL3: JP24.10 SJ8.1 U10.SCL
SCL4: JP31.10 SJ10.1 U13.SCL
SCL5: JP38.10 SJ12.1 U16.SCL
SCL6: JP45.10 SJ14.1 U19.SCL
SCL7: JP52.10 SJ16.1 U22.SCL
SCL8: JP59.10 SJ18.1 U25.SCL
SDA: JP5.9 SJ1.1 U2.SDA
SDA1: JP10.9 SJ3.1 U4.SDA
SDA2: JP17.9 SJ5.1 U7.SDA
SDA3: JP24.9 SJ7.1 U10.SDA
SDA4: JP31.9 SJ9.1 U13.SDA
SDA5: JP38.9 SJ11.1 U16.SDA
SDA6: JP45.9 SJ13.1 U19.SDA
SDA7: JP52.9 SJ15.1 U22.SDA
SDA8: JP59.9 SJ17.1 U25.SDA
TX: JP4.2 U2.TX
TX1: JP9.2 U4.TX
TX2: JP16.2 U7.TX
TX3: JP23.2 U10.TX
TX4: JP30.2 U13.TX
TX5: JP37.2 U16.TX
TX6: JP44.2 U19.TX
TX7: JP51.2 U22.TX
TX8: JP58.2 U25.TX
VIN: JP7.8 U2.VIN
VIN1: JP12.8 U4.VIN
VIN2: JP19.8 U7.VIN
VIN3: JP26.8 U10.VIN
VIN4: JP33.8 U13.VIN
VIN5: JP40.8 U16.VIN
VIN6: JP47.8 U19.VIN
VIN7: JP54.8 U22.VIN
VIN8: JP61.8 U25.VIN

## Tracks (layer width: path | path; a pad name or v marks a point on that pad's centre or on a via)
3.3V  (via drill 0.51)
  Top 0.254: U1.4 32.82,12.39 33.79,11.42 34.8,11.42 | v22.73,10.03 22.73,12.57 23.37,13.21 U3.1 24.64,13.07 C1.1 | v34.8,10.03 34.8,11.42 | 34.8,11.42 43.59,11.42 C2.1 46.13,11.52 LED1.A 46.23,13.21 50.04,17.02 C3.1 52.36,33.31 JP7.4
  Bottom 0.254: v22.73,10.03 v34.8,10.03
  Bottom 0.305: JP7.4 U2.3.3V
3.3V1  (via drill 0.51)
  Top 0.254: U5.4 86.67,12.39 87.64,11.42 88.65,11.42 | v76.58,10.03 76.58,12.57 77.22,13.21 U6.1 78.49,13.07 C4.1 | v88.65,10.03 88.65,11.42 | 88.65,11.42 97.44,11.42 C5.1 99.98,11.52 LED2.A 100.08,13.21 103.89,17.02 C6.1 106.21,33.31 JP12.4
  Bottom 0.254: v76.58,10.03 v88.65,10.03
  Bottom 0.305: JP12.4 U4.3.3V
3.3V2  (via drill 0.51)
  Top 0.254: U8.4 140.51,12.39 141.49,11.42 142.49,11.42 | v130.43,10.03 130.43,12.57 131.06,13.21 U9.1 132.33,13.07 C7.1 | v142.49,10.03 142.49,11.42 | 142.49,11.42 151.28,11.42 C8.1 153.82,11.52 LED3.A 153.92,13.21 157.73,17.02 C9.1 160.06,33.31 JP19.4
  Bottom 0.254: v130.43,10.03 v142.49,10.03
  Bottom 0.305: JP19.4 U7.3.3V
3.3V3  (via drill 0.51)
  Top 0.254: U11.4 32.82,72.59 33.79,71.62 34.8,71.62 | v22.73,70.23 22.73,72.77 23.37,73.41 U12.1 24.64,73.27 C10.1 | v34.8,70.23 34.8,71.62 | 34.8,71.62 43.59,71.62 C11.1 46.13,71.72 LED4.A 46.23,73.41 50.04,77.22 C12.1 52.36,93.51 JP26.4
  Bottom 0.254: v22.73,70.23 v34.8,70.23
  Bottom 0.305: JP26.4 U10.3.3V
3.3V4  (via drill 0.51)
  Top 0.254: U14.4 86.67,72.59 87.64,71.62 88.65,71.62 | v76.58,70.23 76.58,72.77 77.22,73.41 U15.1 78.49,73.27 C13.1 | v88.65,70.23 88.65,71.62 | 88.65,71.62 97.44,71.62 C14.1 99.98,71.72 LED5.A 100.08,73.41 103.89,77.22 C15.1 106.21,93.51 JP33.4
  Bottom 0.254: v76.58,70.23 v88.65,70.23
  Bottom 0.305: JP33.4 U13.3.3V
3.3V5  (via drill 0.51)
  Top 0.254: U17.4 140.51,72.59 141.49,71.62 142.49,71.62 | v130.43,70.23 130.43,72.77 131.06,73.41 U18.1 132.33,73.27 C16.1 | v142.49,70.23 142.49,71.62 | 142.49,71.62 151.28,71.62 C17.1 153.82,71.72 LED6.A 153.92,73.41 157.73,77.22 C18.1 160.06,93.51 JP40.4
  Bottom 0.254: v130.43,70.23 v142.49,70.23
  Bottom 0.305: JP40.4 U16.3.3V
3.3V6  (via drill 0.51)
  Top 0.254: U20.4 32.82,132.79 33.79,131.81 34.8,131.81 | v22.73,130.43 22.73,132.97 23.37,133.6 U21.1 24.64,133.46 C19.1 | v34.8,130.43 34.8,131.81 | 34.8,131.81 43.59,131.81 C20.1 46.13,131.91 LED7.A 46.23,133.6 50.04,137.41 C21.1 52.36,153.71 JP47.4
  Bottom 0.254: v22.73,130.43 v34.8,130.43
  Bottom 0.305: JP47.4 U19.3.3V
3.3V7  (via drill 0.51)
  Top 0.254: U23.4 86.67,132.79 87.64,131.81 88.65,131.81 | v76.58,130.43 76.58,132.97 77.22,133.6 U24.1 78.49,133.46 C22.1 | v88.65,130.43 88.65,131.81 | 88.65,131.81 97.44,131.81 C23.1 99.98,131.91 LED8.A 100.08,133.6 103.89,137.41 C24.1 106.21,153.71 JP54.4
  Bottom 0.254: v76.58,130.43 v88.65,130.43
  Bottom 0.305: JP54.4 U22.3.3V
3.3V8  (via drill 0.51)
  Top 0.254: U26.4 140.51,132.79 141.49,131.81 142.49,131.81 | v130.43,130.43 130.43,132.97 131.06,133.6 U27.1 132.33,133.46 C25.1 | v142.49,130.43 142.49,131.81 | 142.49,131.81 151.28,131.81 C26.1 153.82,131.91 LED9.A 153.92,133.6 157.73,137.41 C27.1 160.06,153.71 JP61.4
  Bottom 0.254: v130.43,130.43 v142.49,130.43
  Bottom 0.305: JP61.4 U25.3.3V
5V
  Top 0.254: JP7.5 53.85,36.07 55.12,37.34 55.12,62.74 52.58,65.28 30.99,65.28 J1.2
  Bottom 0.254: JP7.5 U2.5V
5V1
  Top 0.254: JP12.5 107.7,36.07 108.97,37.34 108.97,62.74 106.43,65.28 84.84,65.28 J2.2
  Bottom 0.254: JP12.5 U4.5V
5V2
  Top 0.254: JP19.5 161.54,36.07 162.81,37.34 162.81,62.74 160.27,65.28 138.68,65.28 J3.2
  Bottom 0.254: JP19.5 U7.5V
5V3
  Top 0.254: JP26.5 53.85,96.27 55.12,97.54 55.12,122.94 52.58,125.48 30.99,125.48 J4.2
  Bottom 0.254: JP26.5 U10.5V
5V4
  Top 0.254: JP33.5 107.7,96.27 108.97,97.54 108.97,122.94 106.43,125.48 84.84,125.48 J5.2
  Bottom 0.254: JP33.5 U13.5V
5V5
  Top 0.254: JP40.5 161.54,96.27 162.81,97.54 162.81,122.94 160.27,125.48 138.68,125.48 J6.2
  Bottom 0.254: JP40.5 U16.5V
5V6
  Top 0.254: JP47.5 53.85,156.46 55.12,157.73 55.12,183.13 52.58,185.67 30.99,185.67 J7.2
  Bottom 0.254: JP47.5 U19.5V
5V7
  Top 0.254: JP54.5 107.7,156.46 108.97,157.73 108.97,183.13 106.43,185.67 84.84,185.67 J8.2
  Bottom 0.254: JP54.5 U22.5V
5V8
  Top 0.254: JP61.5 161.54,156.46 162.81,157.73 162.81,183.13 160.27,185.67 138.68,185.67 J9.2
  Bottom 0.254: JP61.5 U25.5V
A0
  Bottom 0.254: JP6.1 U2.A0
A1
  Bottom 0.254: JP6.2 U2.A1
A2
  Bottom 0.254: JP6.3 U2.A2
A3
  Bottom 0.254: JP6.4 U2.A3
A4
  Top 0.254: SJ1.2 46.64,20.61 48.77,22.73 48.77,55.75 51.94,58.93 JP6.5
  Bottom 0.254: JP6.5 U2.A4
A5
  Top 0.254: JP6.6 51.31,61.47 48.13,58.29 48.13,27.18 46.64,25.68 SJ2.2
  Bottom 0.254: JP6.6 U2.A5
A6
  Bottom 0.254: JP11.1 U4.A0
A7
  Bottom 0.254: JP11.2 U4.A1
A8
  Bottom 0.254: JP11.3 U4.A2
A9
  Bottom 0.254: JP11.4 U4.A3
A10
  Top 0.254: SJ3.2 100.49,20.61 102.62,22.73 102.62,55.75 105.79,58.93 JP11.5
  Bottom 0.254: JP11.5 U4.A4
A11
  Top 0.254: JP11.6 105.16,61.47 101.98,58.29 101.98,27.18 100.49,25.68 SJ4.2
  Bottom 0.254: JP11.6 U4.A5
A12
  Bottom 0.254: JP18.1 U7.A0
A13
  Bottom 0.254: JP18.2 U7.A1
A14
  Bottom 0.254: JP18.3 U7.A2
A15
  Bottom 0.254: JP18.4 U7.A3
A16
  Top 0.254: SJ5.2 154.34,20.61 156.46,22.73 156.46,55.75 159.64,58.93 JP18.5
  Bottom 0.254: JP18.5 U7.A4
A17
  Top 0.254: JP18.6 159,61.47 155.83,58.29 155.83,27.18 154.34,25.68 SJ6.2
  Bottom 0.254: JP18.6 U7.A5
A18
  Bottom 0.254: JP25.1 U10.A0
A19
  Bottom 0.254: JP25.2 U10.A1
A20
  Bottom 0.254: JP25.3 U10.A2
A21
  Bottom 0.254: JP25.4 U10.A3
A22
  Top 0.254: SJ7.2 46.64,80.8 48.77,82.93 48.77,115.95 51.94,119.13 JP25.5
  Bottom 0.254: JP25.5 U10.A4
A23
  Top 0.254: JP25.6 51.31,121.67 48.13,118.49 48.13,87.38 46.64,85.88 SJ8.2
  Bottom 0.254: JP25.6 U10.A5
A24
  Bottom 0.254: JP32.1 U13.A0
A25
  Bottom 0.254: JP32.2 U13.A1
A26
  Bottom 0.254: JP32.3 U13.A2
A27
  Bottom 0.254: JP32.4 U13.A3
A28
  Top 0.254: SJ9.2 100.49,80.8 102.62,82.93 102.62,115.95 105.79,119.13 JP32.5
  Bottom 0.254: JP32.5 U13.A4
A29
  Top 0.254: JP32.6 105.16,121.67 101.98,118.49 101.98,87.38 100.49,85.88 SJ10.2
  Bottom 0.254: JP32.6 U13.A5
A30
  Bottom 0.254: JP39.1 U16.A0
A31
  Bottom 0.254: JP39.2 U16.A1
A32
  Bottom 0.254: JP39.3 U16.A2
A33
  Bottom 0.254: JP39.4 U16.A3
A34
  Top 0.254: SJ11.2 154.34,80.8 156.46,82.93 156.46,115.95 159.64,119.13 JP39.5
  Bottom 0.254: JP39.5 U16.A4
A35
  Top 0.254: JP39.6 159,121.67 155.83,118.49 155.83,87.38 154.34,85.88 SJ12.2
  Bottom 0.254: JP39.6 U16.A5
A36
  Bottom 0.254: JP46.1 U19.A0
A37
  Bottom 0.254: JP46.2 U19.A1
A38
  Bottom 0.254: JP46.3 U19.A2
A39
  Bottom 0.254: JP46.4 U19.A3
A40
  Top 0.254: SJ13.2 46.64,141 48.77,143.13 48.77,176.15 51.94,179.32 JP46.5
  Bottom 0.254: JP46.5 U19.A4
A41
  Top 0.254: JP46.6 51.31,181.86 48.13,178.69 48.13,147.57 46.64,146.08 SJ14.2
  Bottom 0.254: JP46.6 U19.A5
A42
  Bottom 0.254: JP53.1 U22.A0
A43
  Bottom 0.254: JP53.2 U22.A1
A44
  Bottom 0.254: JP53.3 U22.A2
A45
  Bottom 0.254: JP53.4 U22.A3
A46
  Top 0.254: SJ15.2 100.49,141 102.62,143.13 102.62,176.15 105.79,179.32 JP53.5
  Bottom 0.254: JP53.5 U22.A4
A47
  Top 0.254: JP53.6 105.16,181.86 101.98,178.69 101.98,147.57 100.49,146.08 SJ16.2
  Bottom 0.254: JP53.6 U22.A5
A48
  Bottom 0.254: JP60.1 U25.A0
A49
  Bottom 0.254: JP60.2 U25.A1
A50
  Bottom 0.254: JP60.3 U25.A2
A51
  Bottom 0.254: JP60.4 U25.A3
A52
  Top 0.254: SJ17.2 154.34,141 156.46,143.13 156.46,176.15 159.64,179.32 JP60.5
  Bottom 0.254: JP60.5 U25.A4
A53
  Top 0.254: JP60.6 159,181.86 155.83,178.69 155.83,147.57 154.34,146.08 SJ18.2
  Bottom 0.254: JP60.6 U25.A5
AREF
  Bottom 0.254: U2.AREF JP5.8
AREF1
  Bottom 0.254: U4.AREF JP10.8
AREF2
  Bottom 0.254: U7.AREF JP17.8
AREF3
  Bottom 0.254: U10.AREF JP24.8
AREF4
  Bottom 0.254: U13.AREF JP31.8
AREF5
  Bottom 0.254: U16.AREF JP38.8
AREF6
  Bottom 0.254: U19.AREF JP45.8
AREF7
  Bottom 0.254: U22.AREF JP52.8
AREF8
  Bottom 0.254: U25.AREF JP59.8
CS
  Top 0.254: JP5.1 13.84,39.88 11.94,37.97 11.94,15.11 16.38,10.67 20.19,10.67 21.46,11.94 21.46,14.48 22.73,15.75 U3.3
  Bottom 0.254: U2.D8 JP5.1
CS1
  Top 0.254: JP10.1 67.69,39.88 65.79,37.97 65.79,15.11 70.23,10.67 74.04,10.67 75.31,11.94 75.31,14.48 76.58,15.75 U6.3
  Bottom 0.254: U4.D8 JP10.1
CS2
  Top 0.254: JP17.1 121.54,39.88 119.63,37.97 119.63,15.11 124.08,10.67 127.89,10.67 129.16,11.94 129.16,14.48 130.43,15.75 U9.3
  Bottom 0.254: U7.D8 JP17.1
CS3
  Top 0.254: JP24.1 13.84,100.08 11.94,98.17 11.94,75.31 16.38,70.87 20.19,70.87 21.46,72.14 21.46,74.68 22.73,75.95 U12.3
  Bottom 0.254: U10.D8 JP24.1
CS4
  Top 0.254: JP31.1 67.69,100.08 65.79,98.17 65.79,75.31 70.23,70.87 74.04,70.87 75.31,72.14 75.31,74.68 76.58,75.95 U15.3
  Bottom 0.254: U13.D8 JP31.1
CS5
  Top 0.254: JP38.1 121.54,100.08 119.63,98.17 119.63,75.31 124.08,70.87 127.89,70.87 129.16,72.14 129.16,74.68 130.43,75.95 U18.3
  Bottom 0.254: U16.D8 JP38.1
CS6
  Top 0.254: JP45.1 13.84,160.27 11.94,158.37 11.94,135.51 16.38,131.06 20.19,131.06 21.46,132.33 21.46,134.87 22.73,136.14 U21.3
  Bottom 0.254: U19.D8 JP45.1
CS7
  Top 0.254: JP52.1 67.69,160.27 65.79,158.37 65.79,135.51 70.23,131.06 74.04,131.06 75.31,132.33 75.31,134.87 76.58,136.14 U24.3
  Bottom 0.254: U22.D8 JP52.1
CS8
  Top 0.254: JP59.1 121.54,160.27 119.63,158.37 119.63,135.51 124.08,131.06 127.89,131.06 129.16,132.33 129.16,134.87 130.43,136.14 U27.3
  Bottom 0.254: U25.D8 JP59.1
D1
  Bottom 0.254: U4.D2 JP9.3
D2
  Bottom 0.254: U2.D2 JP4.3
D3
  Bottom 0.254: U2.D3 JP4.4
D4
  Bottom 0.254: U2.D4 JP4.5
D5
  Bottom 0.254: U2.D5 JP4.6
D6
  Bottom 0.254: U2.D6 JP4.7
D7
  Bottom 0.254: U2.D7 JP4.8
D8
  Bottom 0.254: U4.D3 JP9.4
D9
  Bottom 0.254: U2.D9 JP5.2
D10
  Bottom 0.254: U2.D10 JP5.3
D11
  Bottom 0.254: U4.D4 JP9.5
D12
  Bottom 0.254: U4.D5 JP9.6
D13
  Bottom 0.254: U4.D6 JP9.7
D14
  Bottom 0.254: U4.D7 JP9.8
D15
  Bottom 0.254: U4.D9 JP10.2
D16
  Bottom 0.254: U4.D10 JP10.3
D17
  Bottom 0.254: U7.D2 JP16.3
D18
  Bottom 0.254: U7.D3 JP16.4
D19
  Bottom 0.254: U7.D4 JP16.5
D20
  Bottom 0.254: U7.D5 JP16.6
D21
  Bottom 0.254: U7.D6 JP16.7
D22
  Bottom 0.254: U7.D7 JP16.8
D23
  Bottom 0.254: U7.D9 JP17.2
D24
  Bottom 0.254: U7.D10 JP17.3
D25
  Bottom 0.254: U10.D2 JP23.3
D26
  Bottom 0.254: U10.D3 JP23.4
D27
  Bottom 0.254: U10.D4 JP23.5
D28
  Bottom 0.254: U10.D5 JP23.6
D29
  Bottom 0.254: U10.D6 JP23.7
D30
  Bottom 0.254: U10.D7 JP23.8
D31
  Bottom 0.254: U10.D9 JP24.2
D32
  Bottom 0.254: U10.D10 JP24.3
D33
  Bottom 0.254: U13.D2 JP30.3
D34
  Bottom 0.254: U13.D3 JP30.4
D35
  Bottom 0.254: U13.D4 JP30.5
D36
  Bottom 0.254: U13.D5 JP30.6
D37
  Bottom 0.254: U13.D6 JP30.7
D38
  Bottom 0.254: U13.D7 JP30.8
D39
  Bottom 0.254: U13.D9 JP31.2
D40
  Bottom 0.254: U13.D10 JP31.3
D41
  Bottom 0.254: U16.D2 JP37.3
D42
  Bottom 0.254: U16.D3 JP37.4
D43
  Bottom 0.254: U16.D4 JP37.5
D44
  Bottom 0.254: U16.D5 JP37.6
D45
  Bottom 0.254: U16.D6 JP37.7
D46
  Bottom 0.254: U16.D7 JP37.8
D47
  Bottom 0.254: U16.D9 JP38.2
D48
  Bottom 0.254: U16.D10 JP38.3
D49
  Bottom 0.254: U19.D2 JP44.3
D50
  Bottom 0.254: U19.D3 JP44.4
D51
  Bottom 0.254: U19.D4 JP44.5
D52
  Bottom 0.254: U19.D5 JP44.6
D53
  Bottom 0.254: U19.D6 JP44.7
D54
  Bottom 0.254: U19.D7 JP44.8
D55
  Bottom 0.254: U19.D9 JP45.2
D56
  Bottom 0.254: U19.D10 JP45.3
D57
  Bottom 0.254: U22.D2 JP51.3
D58
  Bottom 0.254: U22.D3 JP51.4
D59
  Bottom 0.254: U22.D4 JP51.5
D60
  Bottom 0.254: U22.D5 JP51.6
D61
  Bottom 0.254: U22.D6 JP51.7
D62
  Bottom 0.254: U22.D7 JP51.8
D63
  Bottom 0.254: U22.D9 JP52.2
D64
  Bottom 0.254: U22.D10 JP52.3
D65
  Bottom 0.254: U25.D2 JP58.3
D66
  Bottom 0.254: U25.D3 JP58.4
D67
  Bottom 0.254: U25.D4 JP58.5
D68
  Bottom 0.254: U25.D5 JP58.6
D69
  Bottom 0.254: U25.D6 JP58.7
D70
  Bottom 0.254: U25.D7 JP58.8
D71
  Bottom 0.254: U25.D9 JP59.2
D72
  Bottom 0.254: U25.D10 JP59.3
GND
  Top 0.254: U2.GND@0 58.93,37.34 58.93,22.1 57.02,20.19 S1.1 | U1.GND1 40.78,8.5 41.15,8.13 54.74,8.13 57.15,10.54 57.15,13.08 S1.2
  Bottom 0.254: U2.GND@0 U2.GND@1 53.21,41.15 | J1.6 47.5,64.01 50.04,61.47 50.04,42.42 51.31,41.15 JP7.7 53.21,41.15 | U2.GND@2 JP5.7 | JP7.6 52.58,40.51 53.21,41.15
  pour Bottom: 9.4,6.86 6.86,9.4 6.86,62.74 8.13,64.01 19.56,64.01 22.1,66.55 55.12,66.55 57.66,64.01 60.2,64.01 60.2,9.4 57.66,6.86
  pour Top: 9.4,6.86 6.86,9.4 6.86,62.74 8.13,64.01 19.56,64.01 22.1,66.55 55.12,66.55 57.66,64.01 60.2,64.01 60.2,9.4 57.66,6.86
GND1
  Top 0.254: U4.GND@0 112.78,37.34 112.78,22.1 110.87,20.19 S2.1 | U5.GND1 94.63,8.5 95,8.13 108.58,8.13 111,10.54 111,13.08 S2.2
  Bottom 0.254: U4.GND@0 U4.GND@1 107.06,41.15 | J2.6 101.35,64.01 103.89,61.47 103.89,42.42 105.16,41.15 JP12.7 107.06,41.15 | U4.GND@2 JP10.7 | JP12.6 106.43,40.51 107.06,41.15
  pour Bottom: 63.25,6.86 60.71,9.4 60.71,62.74 61.98,64.01 73.41,64.01 75.95,66.55 108.97,66.55 111.51,64.01 114.05,64.01 114.05,9.4 111.51,6.86
  pour Top: 63.25,6.86 60.71,9.4 60.71,62.74 61.98,64.01 73.41,64.01 75.95,66.55 108.97,66.55 111.51,64.01 114.05,64.01 114.05,9.4 111.51,6.86
GND2
  Top 0.254: U7.GND@0 166.62,37.34 166.62,22.1 164.72,20.19 S3.1 | U8.GND1 148.47,8.5 148.84,8.13 162.43,8.13 164.85,10.54 164.85,13.08 S3.2
  Bottom 0.254: U7.GND@0 U7.GND@1 160.91,41.15 | J3.6 155.19,64.01 157.73,61.47 157.73,42.42 159,41.15 JP19.7 160.91,41.15 | U7.GND@2 JP17.7 | JP19.6 160.27,40.51 160.91,41.15
  pour Bottom: 117.09,6.86 114.55,9.4 114.55,62.74 115.82,64.01 127.25,64.01 129.79,66.55 162.81,66.55 165.35,64.01 167.89,64.01 167.89,9.4 165.35,6.86
  pour Top: 117.09,6.86 114.55,9.4 114.55,62.74 115.82,64.01 127.25,64.01 129.79,66.55 162.81,66.55 165.35,64.01 167.89,64.01 167.89,9.4 165.35,6.86
GND3
  Top 0.254: U10.GND@0 58.93,97.54 58.93,82.3 57.02,80.39 S4.1 | U11.GND1 40.78,68.7 41.15,68.33 54.74,68.33 57.15,70.74 57.15,73.28 S4.2
  Bottom 0.254: U10.GND@0 U10.GND@1 53.21,101.35 | J4.6 47.5,124.21 50.04,121.67 50.04,102.62 51.31,101.35 JP26.7 53.21,101.35 | U10.GND@2 JP24.7 | JP26.6 52.58,100.71 53.21,101.35
  pour Bottom: 9.4,67.06 6.86,69.6 6.86,122.94 8.13,124.21 19.56,124.21 22.1,126.75 55.12,126.75 57.66,124.21 60.2,124.21 60.2,69.6 57.66,67.06
  pour Top: 9.4,67.06 6.86,69.6 6.86,122.94 8.13,124.21 19.56,124.21 22.1,126.75 55.12,126.75 57.66,124.21 60.2,124.21 60.2,69.6 57.66,67.06
GND4
  Top 0.254: U13.GND@0 112.78,97.54 112.78,82.3 110.87,80.39 S5.1 | U14.GND1 94.63,68.7 95,68.33 108.58,68.33 111,70.74 111,73.28 S5.2
  Bottom 0.254: U13.GND@0 U13.GND@1 107.06,101.35 | J5.6 101.35,124.21 103.89,121.67 103.89,102.62 105.16,101.35 JP33.7 107.06,101.35 | U13.GND@2 JP31.7 | JP33.6 106.43,100.71 107.06,101.35
  pour Bottom: 63.25,67.06 60.71,69.6 60.71,122.94 61.98,124.21 73.41,124.21 75.95,126.75 108.97,126.75 111.51,124.21 114.05,124.21 114.05,69.6 111.51,67.06
  pour Top: 63.25,67.06 60.71,69.6 60.71,122.94 61.98,124.21 73.41,124.21 75.95,126.75 108.97,126.75 111.51,124.21 114.05,124.21 114.05,69.6 111.51,67.06
GND5
  Top 0.254: U16.GND@0 166.62,97.54 166.62,82.3 164.72,80.39 S6.1 | U17.GND1 148.47,68.7 148.84,68.33 162.43,68.33 164.85,70.74 164.85,73.28 S6.2
  Bottom 0.254: U16.GND@0 U16.GND@1 160.91,101.35 | J6.6 155.19,124.21 157.73,121.67 157.73,102.62 159,101.35 JP40.7 160.91,101.35 | U16.GND@2 JP38.7 | JP40.6 160.27,100.71 160.91,101.35
  pour Bottom: 117.09,67.06 114.55,69.6 114.55,122.94 115.82,124.21 127.25,124.21 129.79,126.75 162.81,126.75 165.35,124.21 167.89,124.21 167.89,69.6 165.35,67.06
  pour Top: 117.09,67.06 114.55,69.6 114.55,122.94 115.82,124.21 127.25,124.21 129.79,126.75 162.81,126.75 165.35,124.21 167.89,124.21 167.89,69.6 165.35,67.06
GND6
  Top 0.254: U19.GND@0 58.93,157.73 58.93,142.49 57.02,140.59 S7.1 | U20.GND1 40.78,128.89 41.15,128.52 54.74,128.52 57.15,130.94 57.15,133.48 S7.2
  Bottom 0.254: U19.GND@0 U19.GND@1 53.21,161.54 | J7.6 47.5,184.4 50.04,181.86 50.04,162.81 51.31,161.54 JP47.7 53.21,161.54 | U19.GND@2 JP45.7 | JP47.6 52.58,160.91 53.21,161.54
  pour Bottom: 9.4,127.25 6.86,129.79 6.86,183.13 8.13,184.4 19.56,184.4 22.1,186.94 55.12,186.94 57.66,184.4 60.2,184.4 60.2,129.79 57.66,127.25
  pour Top: 9.4,127.25 6.86,129.79 6.86,183.13 8.13,184.4 19.56,184.4 22.1,186.94 55.12,186.94 57.66,184.4 60.2,184.4 60.2,129.79 57.66,127.25
GND7
  Top 0.254: U22.GND@0 112.78,157.73 112.78,142.49 110.87,140.59 S8.1 | U23.GND1 94.63,128.89 95,128.52 108.58,128.52 111,130.94 111,133.48 S8.2
  Bottom 0.254: U22.GND@0 U22.GND@1 107.06,161.54 | J8.6 101.35,184.4 103.89,181.86 103.89,162.81 105.16,161.54 JP54.7 107.06,161.54 | U22.GND@2 JP52.7 | JP54.6 106.43,160.91 107.06,161.54
  pour Bottom: 63.25,127.25 60.71,129.79 60.71,183.13 61.98,184.4 73.41,184.4 75.95,186.94 108.97,186.94 111.51,184.4 114.05,184.4 114.05,129.79 111.51,127.25
  pour Top: 63.25,127.25 60.71,129.79 60.71,183.13 61.98,184.4 73.41,184.4 75.95,186.94 108.97,186.94 111.51,184.4 114.05,184.4 114.05,129.79 111.51,127.25
GND8
  Top 0.254: U25.GND@0 166.62,157.73 166.62,142.49 164.72,140.59 S9.1 | U26.GND1 148.47,128.89 148.84,128.52 162.43,128.52 164.85,130.94 164.85,133.48 S9.2
  Bottom 0.254: U25.GND@0 U25.GND@1 160.91,161.54 | J9.6 155.19,184.4 157.73,181.86 157.73,162.81 159,161.54 JP61.7 160.91,161.54 | U25.GND@2 JP59.7 | JP61.6 160.27,160.91 160.91,161.54
  pour Bottom: 117.09,127.25 114.55,129.79 114.55,183.13 115.82,184.4 127.25,184.4 129.79,186.94 162.81,186.94 165.35,184.4 167.89,184.4 167.89,129.79 165.35,127.25
  pour Top: 117.09,127.25 114.55,129.79 114.55,183.13 115.82,184.4 127.25,184.4 129.79,186.94 162.81,186.94 165.35,184.4 167.89,184.4 167.89,129.79 165.35,127.25
IOREF
  Bottom 0.254: JP7.2 U2.IOREF
IOREF1
  Bottom 0.254: JP12.2 U4.IOREF
IOREF2
  Bottom 0.254: JP19.2 U7.IOREF
IOREF3
  Bottom 0.254: JP26.2 U10.IOREF
IOREF4
  Bottom 0.254: JP33.2 U13.IOREF
IOREF5
  Bottom 0.254: JP40.2 U16.IOREF
IOREF6
  Bottom 0.254: JP47.2 U19.IOREF
IOREF7
  Bottom 0.254: JP54.2 U22.IOREF
IOREF8
  Bottom 0.254: JP61.2 U25.IOREF
MISO
  Top 0.254: U1.7 29.52,10.47 27.81,8.76 15.11,8.76 8.13,15.75 8.13,28.45 U2.D12
  Bottom 0.254: JP5.5 U2.D12 17.02,29.72 18.29,30.99 18.29,57.66 22.1,61.47 J1.1
MISO1
  Top 0.254: U5.7 83.37,10.47 81.66,8.76 68.96,8.76 61.98,15.75 61.98,28.45 U4.D12
  Bottom 0.254: JP10.5 U4.D12 70.87,29.72 72.14,30.99 72.14,57.66 75.95,61.47 J2.1
MISO2
  Top 0.254: U8.7 137.21,10.47 135.51,8.76 122.81,8.76 115.82,15.75 115.82,28.45 U7.D12
  Bottom 0.254: JP17.5 U7.D12 124.71,29.72 125.98,30.99 125.98,57.66 129.79,61.47 J3.1
MISO3
  Top 0.254: U11.7 29.52,70.67 27.81,68.96 15.11,68.96 8.13,75.95 8.13,88.65 U10.D12
  Bottom 0.254: JP24.5 U10.D12 17.02,89.92 18.29,91.19 18.29,117.86 22.1,121.67 J4.1
MISO4
  Top 0.254: U14.7 83.37,70.67 81.66,68.96 68.96,68.96 61.98,75.95 61.98,88.65 U13.D12
  Bottom 0.254: JP31.5 U13.D12 70.87,89.92 72.14,91.19 72.14,117.86 75.95,121.67 J5.1
MISO5
  Top 0.254: U17.7 137.21,70.67 135.51,68.96 122.81,68.96 115.82,75.95 115.82,88.65 U16.D12
  Bottom 0.254: JP38.5 U16.D12 124.71,89.92 125.98,91.19 125.98,117.86 129.79,121.67 J6.1
MISO6
  Top 0.254: U20.7 29.52,130.86 27.81,129.16 15.11,129.16 8.13,136.14 8.13,148.84 U19.D12
  Bottom 0.254: JP45.5 U19.D12 17.02,150.11 18.29,151.38 18.29,178.05 22.1,181.86 J7.1
MISO7
  Top 0.254: U23.7 83.37,130.86 81.66,129.16 68.96,129.16 61.98,136.14 61.98,148.84 U22.D12
  Bottom 0.254: JP52.5 U22.D12 70.87,150.11 72.14,151.38 72.14,178.05 75.95,181.86 J8.1
MISO8
  Top 0.254: U26.7 137.21,130.86 135.51,129.16 122.81,129.16 115.82,136.14 115.82,148.84 U25.D12
  Bottom 0.254: JP59.5 U25.D12 124.71,150.11 125.98,151.38 125.98,178.05 129.79,181.86 J9.1
MOSI
  Top 0.254: U3.5 22.73,18.29 20.19,20.83 20.19,22.73 16.38,26.54 16.38,30.35 JP5.4
  Bottom 0.254: J1.4 30.99,65.28 23.37,65.28 17.02,58.93 17.02,33.53 15.75,32.26 JP5.4 U2.D11
MOSI1
  Top 0.254: U6.5 76.58,18.29 74.04,20.83 74.04,22.73 70.23,26.54 70.23,30.35 JP10.4
  Bottom 0.254: J2.4 84.84,65.28 77.22,65.28 70.87,58.93 70.87,33.53 69.6,32.26 JP10.4 U4.D11
MOSI2
  Top 0.254: U9.5 130.43,18.29 127.89,20.83 127.89,22.73 124.08,26.54 124.08,30.35 JP17.4
  Bottom 0.254: J3.4 138.68,65.28 131.06,65.28 124.71,58.93 124.71,33.53 123.44,32.26 JP17.4 U7.D11
MOSI3
  Top 0.254: U12.5 22.73,78.49 20.19,81.03 20.19,82.93 16.38,86.74 16.38,90.55 JP24.4
  Bottom 0.254: J4.4 30.99,125.48 23.37,125.48 17.02,119.13 17.02,93.73 15.75,92.46 JP24.4 U10.D11
MOSI4
  Top 0.254: U15.5 76.58,78.49 74.04,81.03 74.04,82.93 70.23,86.74 70.23,90.55 JP31.4
  Bottom 0.254: J5.4 84.84,125.48 77.22,125.48 70.87,119.13 70.87,93.73 69.6,92.46 JP31.4 U13.D11
MOSI5
  Top 0.254: U18.5 130.43,78.49 127.89,81.03 127.89,82.93 124.08,86.74 124.08,90.55 JP38.4
  Bottom 0.254: J6.4 138.68,125.48 131.06,125.48 124.71,119.13 124.71,93.73 123.44,92.46 JP38.4 U16.D11
MOSI6
  Top 0.254: U21.5 22.73,138.68 20.19,141.22 20.19,143.13 16.38,146.94 16.38,150.75 JP45.4
  Bottom 0.254: J7.4 30.99,185.67 23.37,185.67 17.02,179.32 17.02,153.92 15.75,152.65 JP45.4 U19.D11
MOSI7
  Top 0.254: U24.5 76.58,138.68 74.04,141.22 74.04,143.13 70.23,146.94 70.23,150.75 JP52.4
  Bottom 0.254: J8.4 84.84,185.67 77.22,185.67 70.87,179.32 70.87,153.92 69.6,152.65 JP52.4 U22.D11
MOSI8
  Top 0.254: U27.5 130.43,138.68 127.89,141.22 127.89,143.13 124.08,146.94 124.08,150.75 JP59.4
  Bottom 0.254: J9.4 138.68,185.67 131.06,185.67 124.71,179.32 124.71,153.92 123.44,152.65 JP59.4 U25.D11
N$1  (via drill 0.51)
  Top 0.254: U6.4 v81.03,17.02 | v87.38,16.38 87.38,16.13 87.76,15.75 87.76,13.95 U5.3
  Bottom 0.254: v81.03,17.02 86.74,17.02 v87.38,16.38
N$2  (via drill 0.51)
  Top 0.254: U3.4 v27.18,17.02 | v33.53,16.38 33.53,16.13 33.91,15.75 33.91,13.95 U1.3
  Bottom 0.254: v27.18,17.02 32.89,17.02 v33.53,16.38
N$3
  Top 0.254: LED2.C 102.52,9.92 R2.2
N$4
  Top 0.254: U3.6 29.72,19.56 31.72,17.56 U1.5
N$5  (via drill 1.02 pad 1.88)
  other vias: 100.08,57.66
N$6
  Top 0.254: LED1.C 48.67,9.92 R1.2
N$7  (via drill 1.02 pad 1.88)
  other vias: 46.23,57.66
N$8  (via drill 1.02 pad 1.88)
  other vias: 97.54,57.66
N$9  (via drill 1.02 pad 1.88)
  other vias: 43.69,57.66
N$10  (via drill 1.02 pad 1.88)
  other vias: 41.15,57.66
N$11  (via drill 1.02 pad 1.88)
  other vias: 38.61,57.66
N$12  (via drill 1.02 pad 1.88)
  other vias: 36.07,57.66
N$13  (via drill 1.02 pad 1.88)
  other vias: 33.53,57.66
N$14  (via drill 1.02 pad 1.88)
  other vias: 30.99,57.66
N$15  (via drill 1.02 pad 1.88)
  other vias: 28.45,57.66
N$16  (via drill 1.02 pad 1.88)
  other vias: 25.91,57.66
N$17  (via drill 1.02 pad 1.88)
  other vias: 23.37,57.66
N$18  (via drill 1.02 pad 1.88)
  other vias: 20.83,57.66
N$19  (via drill 1.02 pad 1.88)
  other vias: 95,57.66
N$20  (via drill 1.02 pad 1.88)
  other vias: 92.46,57.66
N$21  (via drill 1.02 pad 1.88)
  other vias: 20.83,55.12
N$22  (via drill 1.02 pad 1.88)
  other vias: 23.37,55.12
N$23  (via drill 1.02 pad 1.88)
  other vias: 25.91,55.12
N$24  (via drill 1.02 pad 1.88)
  other vias: 28.45,55.12
N$25  (via drill 1.02 pad 1.88)
  other vias: 30.99,55.12
N$26  (via drill 1.02 pad 1.88)
  other vias: 33.53,55.12
N$27  (via drill 1.02 pad 1.88)
  other vias: 36.07,55.12
N$28  (via drill 1.02 pad 1.88)
  other vias: 38.61,55.12
N$29  (via drill 1.02 pad 1.88)
  other vias: 41.15,55.12
N$30  (via drill 1.02 pad 1.88)
  other vias: 43.69,55.12
N$31  (via drill 1.02 pad 1.88)
  other vias: 46.23,55.12
N$32  (via drill 1.02 pad 1.88)
  other vias: 89.92,57.66
N$33  (via drill 1.02 pad 1.88)
  other vias: 87.38,57.66
N$34  (via drill 1.02 pad 1.88)
  other vias: 46.23,52.58
N$35  (via drill 1.02 pad 1.88)
  other vias: 43.69,52.58
N$36  (via drill 1.02 pad 1.88)
  other vias: 41.15,52.58
N$37  (via drill 1.02 pad 1.88)
  other vias: 38.61,52.58
N$38  (via drill 1.02 pad 1.88)
  other vias: 36.07,52.58
N$39  (via drill 1.02 pad 1.88)
  other vias: 33.53,52.58
N$40  (via drill 1.02 pad 1.88)
  other vias: 30.99,52.58
N$41  (via drill 1.02 pad 1.88)
  other vias: 28.45,52.58
N$42  (via drill 1.02 pad 1.88)
  other vias: 25.91,52.58
N$43  (via drill 1.02 pad 1.88)
  other vias: 23.37,52.58
N$44  (via drill 1.02 pad 1.88)
  other vias: 20.83,52.58
N$45  (via drill 1.02 pad 1.88)
  other vias: 84.84,57.66
N$46  (via drill 1.02 pad 1.88)
  other vias: 82.3,57.66
N$47  (via drill 1.02 pad 1.88)
  other vias: 20.83,50.04
N$48  (via drill 1.02 pad 1.88)
  other vias: 23.37,50.04
N$49  (via drill 1.02 pad 1.88)
  other vias: 25.91,50.04
N$50  (via drill 1.02 pad 1.88)
  other vias: 28.45,50.04
N$51  (via drill 1.02 pad 1.88)
  other vias: 30.99,50.04
N$52  (via drill 1.02 pad 1.88)
  other vias: 33.53,50.04
N$53  (via drill 1.02 pad 1.88)
  other vias: 36.07,50.04
N$54  (via drill 1.02 pad 1.88)
  other vias: 38.61,50.04
N$55  (via drill 1.02 pad 1.88)
  other vias: 41.15,50.04
N$56  (via drill 1.02 pad 1.88)
  other vias: 43.69,50.04
N$57  (via drill 1.02 pad 1.88)
  other vias: 46.23,50.04
N$58  (via drill 1.02 pad 1.88)
  other vias: 79.76,57.66
N$59  (via drill 1.02 pad 1.88)
  other vias: 77.22,57.66
N$60  (via drill 1.02 pad 1.88)
  other vias: 46.23,47.5
N$61  (via drill 1.02 pad 1.88)
  other vias: 43.69,47.5
N$62  (via drill 1.02 pad 1.88)
  other vias: 41.15,47.5
N$63  (via drill 1.02 pad 1.88)
  other vias: 38.61,47.5
N$64  (via drill 1.02 pad 1.88)
  other vias: 36.07,47.5
N$65  (via drill 1.02 pad 1.88)
  other vias: 33.53,47.5
N$66  (via drill 1.02 pad 1.88)
  other vias: 30.99,47.5
N$67  (via drill 1.02 pad 1.88)
  other vias: 28.45,47.5
N$68  (via drill 1.02 pad 1.88)
  other vias: 25.91,47.5
N$69  (via drill 1.02 pad 1.88)
  other vias: 23.37,47.5
N$70  (via drill 1.02 pad 1.88)
  other vias: 20.83,47.5
N$71  (via drill 1.02 pad 1.88)
  other vias: 74.68,57.66
N$72  (via drill 1.02 pad 1.88)
  other vias: 74.68,55.12
N$73  (via drill 1.02 pad 1.88)
  other vias: 20.83,44.96
N$74  (via drill 1.02 pad 1.88)
  other vias: 23.37,44.96
N$75  (via drill 1.02 pad 1.88)
  other vias: 25.91,44.96
N$76  (via drill 1.02 pad 1.88)
  other vias: 28.45,44.96
N$77  (via drill 1.02 pad 1.88)
  other vias: 30.99,44.96
N$78  (via drill 1.02 pad 1.88)
  other vias: 33.53,44.96
N$79  (via drill 1.02 pad 1.88)
  other vias: 36.07,44.96
N$80  (via drill 1.02 pad 1.88)
  other vias: 38.61,44.96
N$81  (via drill 1.02 pad 1.88)
  other vias: 41.15,44.96
N$82  (via drill 1.02 pad 1.88)
  other vias: 43.69,44.96
N$83  (via drill 1.02 pad 1.88)
  other vias: 46.23,44.96
N$84  (via drill 1.02 pad 1.88)
  other vias: 77.22,55.12
N$85  (via drill 1.02 pad 1.88)
  other vias: 79.76,55.12
N$86  (via drill 1.02 pad 1.88)
  other vias: 46.23,42.42
N$87  (via drill 1.02 pad 1.88)
  other vias: 43.69,42.42
N$88  (via drill 1.02 pad 1.88)
  other vias: 41.15,42.42
N$89  (via drill 1.02 pad 1.88)
  other vias: 38.61,42.42
N$90  (via drill 1.02 pad 1.88)
  other vias: 36.07,42.42
N$91  (via drill 1.02 pad 1.88)
  other vias: 33.53,42.42
N$92  (via drill 1.02 pad 1.88)
  other vias: 30.99,42.42
N$93  (via drill 1.02 pad 1.88)
  other vias: 28.45,42.42
N$94  (via drill 1.02 pad 1.88)
  other vias: 25.91,42.42
N$95  (via drill 1.02 pad 1.88)
  other vias: 23.37,42.42
N$96  (via drill 1.02 pad 1.88)
  other vias: 20.83,42.42
N$97  (via drill 1.02 pad 1.88)
  other vias: 82.3,55.12
N$98  (via drill 1.02 pad 1.88)
  other vias: 84.84,55.12
N$99  (via drill 1.02 pad 1.88)
  other vias: 20.83,39.88
N$100  (via drill 1.02 pad 1.88)
  other vias: 23.37,39.88
N$101  (via drill 1.02 pad 1.88)
  other vias: 25.91,39.88
N$102  (via drill 1.02 pad 1.88)
  other vias: 28.45,39.88
N$103  (via drill 1.02 pad 1.88)
  other vias: 30.99,39.88
N$104  (via drill 1.02 pad 1.88)
  other vias: 33.53,39.88
N$105  (via drill 1.02 pad 1.88)
  other vias: 36.07,39.88
N$106  (via drill 1.02 pad 1.88)
  other vias: 38.61,39.88
N$107  (via drill 1.02 pad 1.88)
  other vias: 41.15,39.88
N$108  (via drill 1.02 pad 1.88)
  other vias: 43.69,39.88
N$109  (via drill 1.02 pad 1.88)
  other vias: 46.23,39.88
N$110  (via drill 1.02 pad 1.88)
  other vias: 87.38,55.12
N$111  (via drill 1.02 pad 1.88)
  other vias: 89.92,55.12
N$112  (via drill 1.02 pad 1.88)
  other vias: 46.23,37.34
N$113  (via drill 1.02 pad 1.88)
  other vias: 43.69,37.34
N$114  (via drill 1.02 pad 1.88)
  other vias: 41.15,37.34
N$115  (via drill 1.02 pad 1.88)
  other vias: 38.61,37.34
N$116  (via drill 1.02 pad 1.88)
  other vias: 36.07,37.34
N$117  (via drill 1.02 pad 1.88)
  other vias: 33.53,37.34
N$118  (via drill 1.02 pad 1.88)
  other vias: 30.99,37.34
N$119  (via drill 1.02 pad 1.88)
  other vias: 28.45,37.34
N$120  (via drill 1.02 pad 1.88)
  other vias: 25.91,37.34
N$121  (via drill 1.02 pad 1.88)
  other vias: 23.37,37.34
N$122  (via drill 1.02 pad 1.88)
  other vias: 20.83,37.34
N$123  (via drill 1.02 pad 1.88)
  other vias: 92.46,55.12
N$124  (via drill 1.02 pad 1.88)
  other vias: 95,55.12
N$125  (via drill 1.02 pad 1.88)
  other vias: 20.83,34.8
N$126  (via drill 1.02 pad 1.88)
  other vias: 23.37,34.8
N$127  (via drill 1.02 pad 1.88)